# EAGLE board FTDI_SmartBasic-Panel-v11 (EAGLE 6.6.0), part 1 of 3
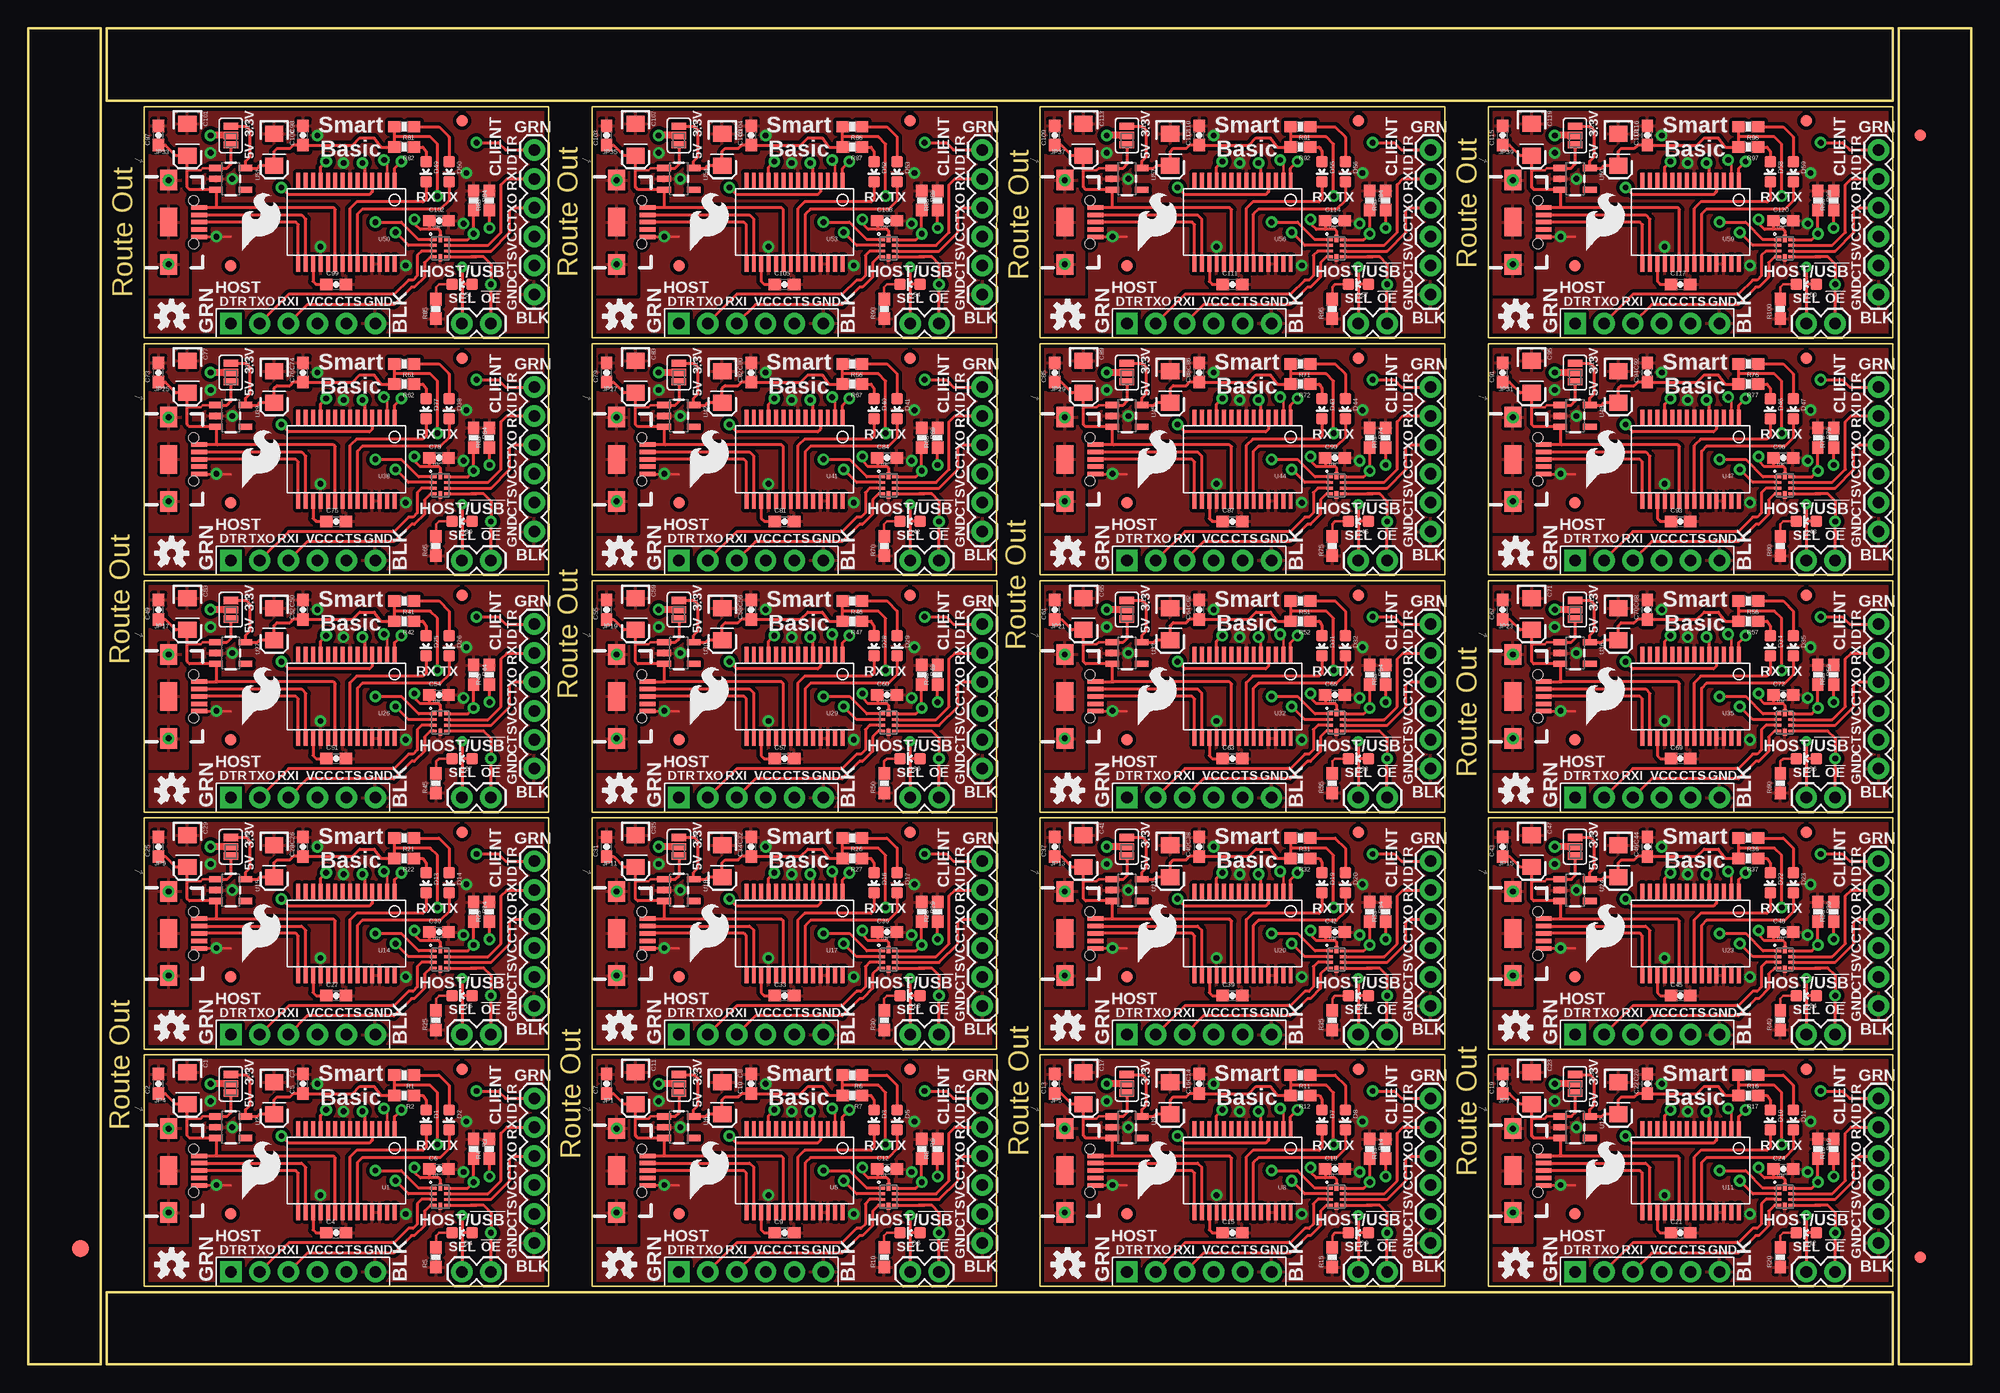
[diagram p0: board, top side]
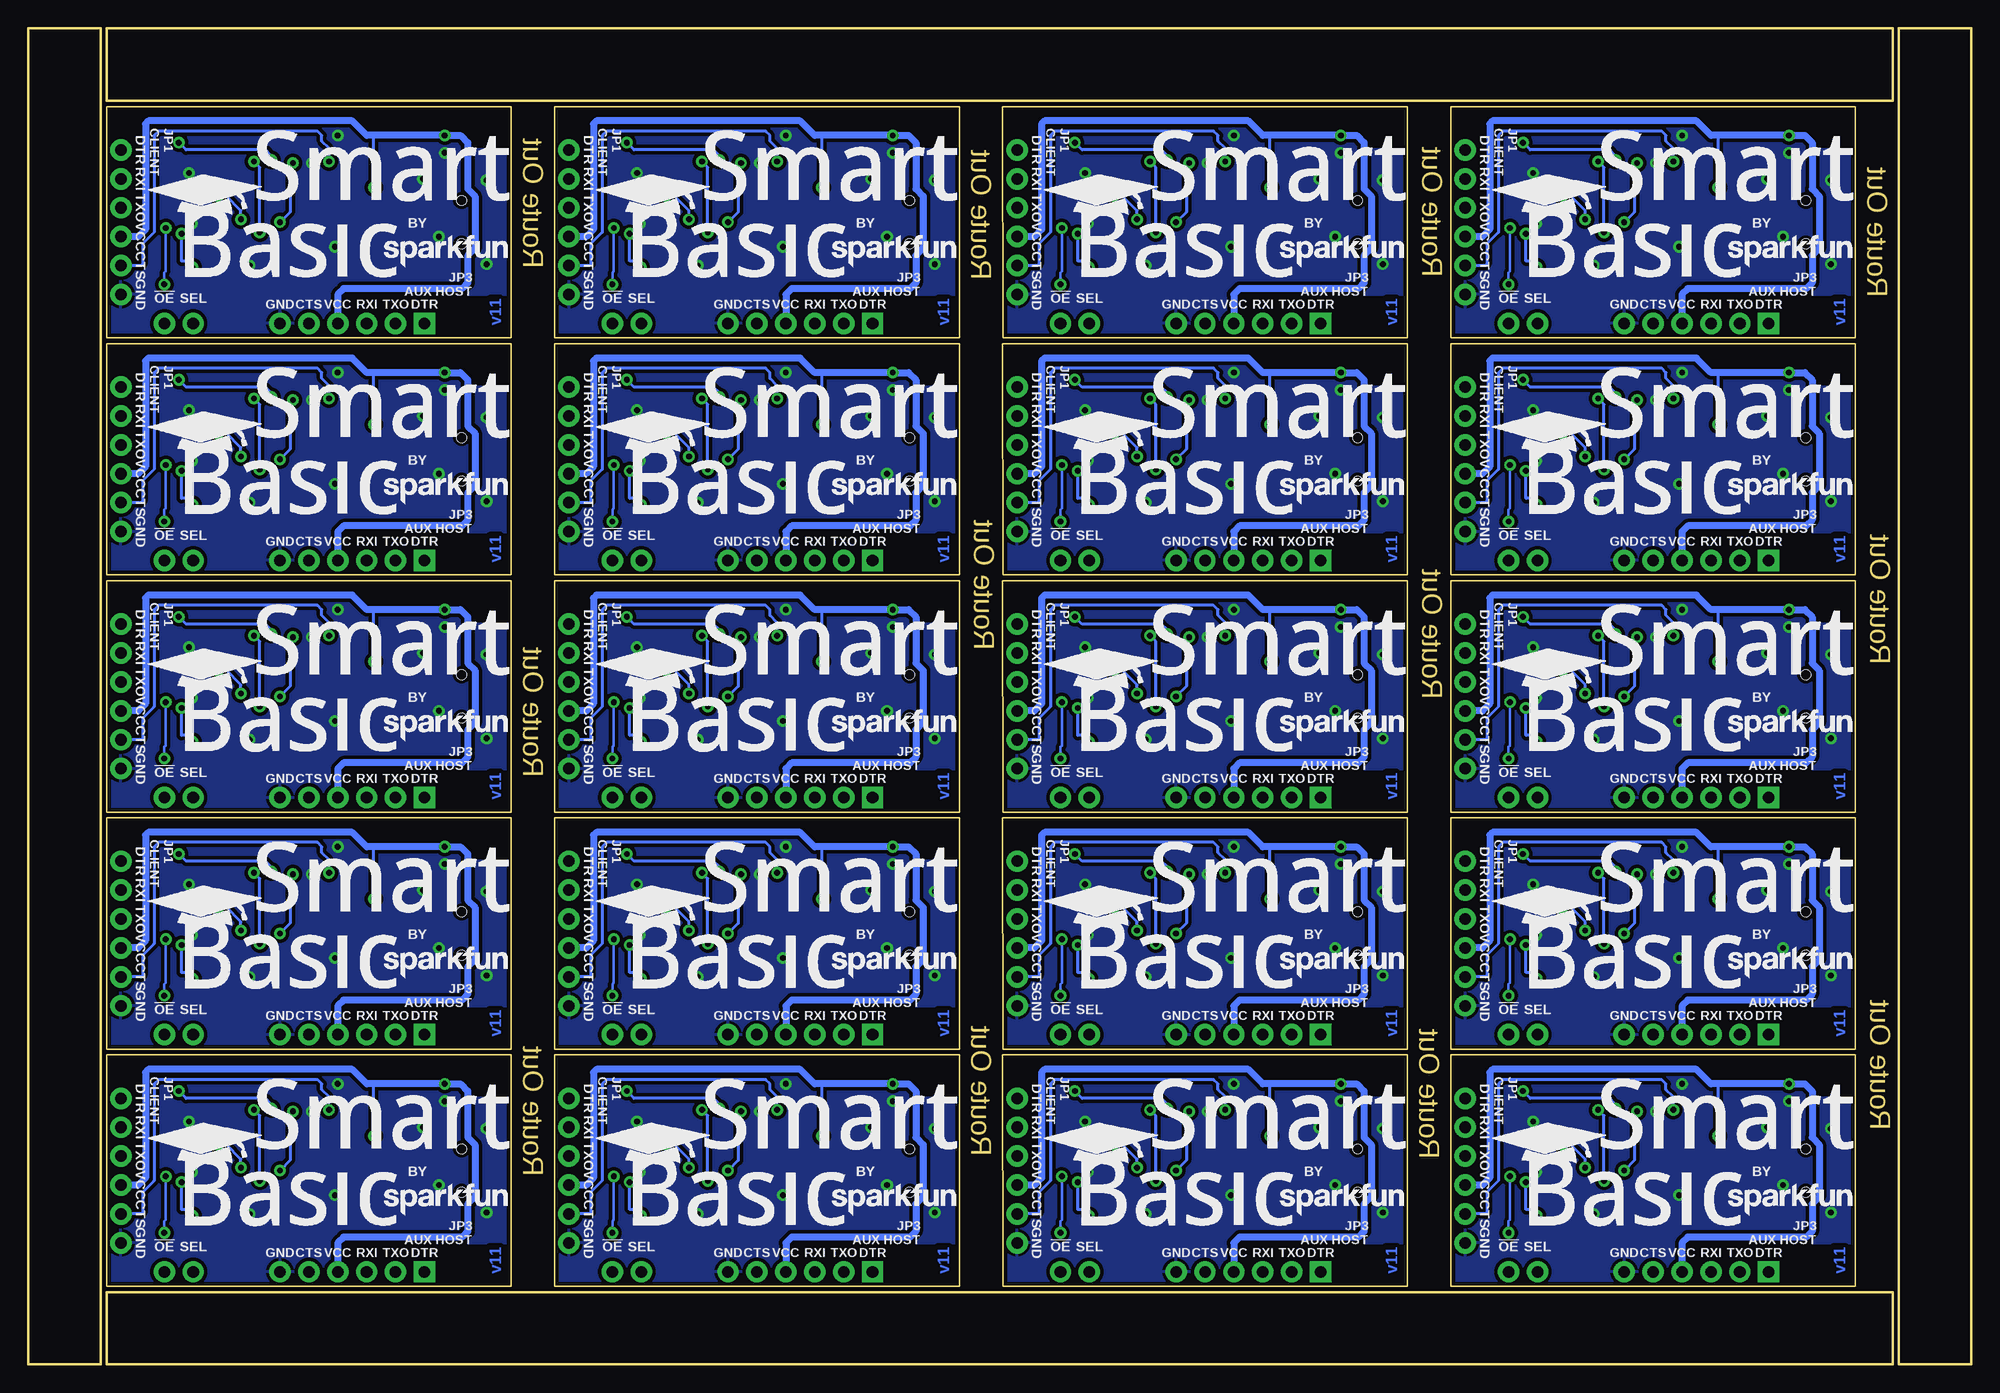
[diagram p1: board, bottom side, seen from below]

Size 170.69 x 117.35 mm. Coordinates in mm from the lower left corner, seen from the top.
Outline: 6.35,79.25 6.35,0 0,0 0,29.72
Outline: 0,28.45 0,117.35 6.35,117.35 6.35,77.98
Outline: 10.16,6.86 45.7,6.86 45.72,27.18 10.16,27.18 10.16,6.86
Outline: 49.53,6.86 85.07,6.86 85.09,27.18 49.53,27.18 49.53,6.86
Outline: 88.9,6.86 124.44,6.86 124.46,27.18 88.9,27.18 88.9,6.86
Outline: 128.27,6.86 163.81,6.86 163.83,27.18 128.27,27.18 128.27,6.86
Outline: 10.16,27.69 45.7,27.69 45.72,48.01 10.16,48.01 10.16,27.69
Outline: 49.53,27.69 85.07,27.69 85.09,48.01 49.53,48.01 49.53,27.69
Outline: 88.9,27.69 124.44,27.69 124.46,48.01 88.9,48.01 88.9,27.69
Outline: 128.27,27.69 163.81,27.69 163.83,48.01 128.27,48.01 128.27,27.69
Outline: 10.16,48.51 45.7,48.51 45.72,68.83 10.16,68.83 10.16,48.51
Outline: 49.53,48.51 85.07,48.51 85.09,68.83 49.53,68.83 49.53,48.51
Outline: 88.9,48.51 124.44,48.51 124.46,68.83 88.9,68.83 88.9,48.51
Outline: 128.27,48.51 163.81,48.51 163.83,68.83 128.27,68.83 128.27,48.51
Outline: 10.16,69.34 45.7,69.34 45.72,89.66 10.16,89.66 10.16,69.34
Outline: 49.53,69.34 85.07,69.34 85.09,89.66 49.53,89.66 49.53,69.34
Outline: 88.9,69.34 124.44,69.34 124.46,89.66 88.9,89.66 88.9,69.34
Outline: 128.27,69.34 163.81,69.34 163.83,89.66 128.27,89.66 128.27,69.34
Outline: 10.16,90.17 45.7,90.17 45.72,110.49 10.16,110.49 10.16,90.17
Outline: 49.53,90.17 85.07,90.17 85.09,110.49 49.53,110.49 49.53,90.17
Outline: 88.9,90.17 124.44,90.17 124.46,110.49 88.9,110.49 88.9,90.17
Outline: 128.27,90.17 163.81,90.17 163.83,110.49 128.27,110.49 128.27,90.17
Outline: 6.86,6.35 6.86,0 163.83,0 163.83,6.35 6.86,6.35
Outline: 170.69,0 170.69,117.35 164.34,117.35 164.34,0 170.69,0
Outline: 163.83,111 163.83,117.35 6.86,117.35 6.86,111 163.83,111
Copper layers (1*16): Top 0.035mm / dielectric 1.5mm / Bottom 0.035mm
Design rules "Sparkfun *": minimum track width 8mil, minimum drill 20mil, track to track 8mil, track to pad 8mil, pad to pad 8mil, via to via 8mil, smd to smd 8mil, copper to edge 8mil, drill to drill 8mil, minimum pad ring 12mil, minimum via ring 10mil, stop-mask expansion 4mil, vias tented up to drill 20mil, thermal gap 10mil

## Footprints (pad centres in the part's own frame; a part is rotated, then mirrored left to right if it is on the bottom)
EIA3216 = smd 1.4 x 1.6: A 1.4,0; C -1.4,0
0603-CAP = smd 1.1 x 1: 1 -0.85,0; 2 0.85,0
FTDI_BASIC = drill 1.016 pad 1.88: CTS 10.16,0; DTR 0,0; GND 12.7,0; RXI 2.54,0; TXO 5.08,0; VCC 7.62,0
LED-0603 = smd 1 x 1: A 0,-0.877; C 0,0.877
FIDUCIAL-1.5X3 = smd 1.5 x 1.5: 1 0,0
FIDUCIAL-1X2 = smd 1 x 1: 1 0,0
FTDI_DEVICE_SIDE = drill 1.016 pad 1.88 square: P$1 -6.35,0 | drill 1.016 pad 1.88: P$2 -3.81,0; P$3 -1.27,0; P$4 1.27,0; P$5 3.81,0; P$6 6.35,0
USB-B-MICRO-SMD_V03 = smd 1.4 x 0.4: D+1 2.7,0; D-1 2.7,0.65; GND1 2.7,-1.3; ID1 2.7,-0.65; VBUS1 2.7,1.3 | smd 1.5 x 1.8: SHIELD1 0,3.7; SHIELD2 0,-3.7 | smd 1.5 x 2.5: SHIELD3 0,0 | hole 0.85: 2.2,1.9; 2.2,-1.9
1X02 = drill 1.016 pad 1.88: 1 0,0; 2 2.54,0
0603-RES = smd 1.1 x 1: 1 -0.85,0; 2 0.85,0
PAD-JUMPER-3-2OF3_NC_BY_PASTE_YES_SILK_FULL_BOX = smd 0.635 x 1.27: 1 -0.813,0; 2 0,0; 3 0.813,0
SSOP28DB = smd 0.348 x 1.397: 1 -4.225,-3.656; 2 -3.575,-3.656; 3 -2.925,-3.656; 4 -2.275,-3.656; 5 -1.625,-3.656; 6 -0.975,-3.656; 7 -0.325,-3.656; 8 0.325,-3.656; 9 0.975,-3.656; 10 1.625,-3.656; 11 2.275,-3.656; 12 2.925,-3.656; 13 3.575,-3.656; 14 4.225,-3.656; 15 4.225,3.656; 16 3.575,3.656; 17 2.925,3.656; 18 2.275,3.656; 19 1.625,3.656; 20 0.975,3.656; 21 0.325,3.656; 22 -0.325,3.656; 23 -0.975,3.656; 24 -1.625,3.656; 25 -2.275,3.656; 26 -2.925,3.656; 27 -3.575,3.656; 28 -4.225,3.656
SOT23-5 = smd 0.55 x 1.2: 1 -0.95,-1.3; 2 0,-1.3; 3 0.95,-1.3; 4 0.95,1.3; 5 -0.95,1.3
QFN-10-RSE = smd 0.58 x 0.25: 1 -0.6,0.75; 2 -0.6,0.25; 3 -0.6,-0.25; 4 -0.6,-0.75; 6 0.6,-0.75; 7 0.6,-0.25; 8 0.6,0.25; 9 0.6,0.75 | smd 0.35 x 0.63: 5 0,-0.85; 10 0,0.85

## Placement (x,y rotation side)
C1  10uF  [EIA3216]  13.97,24.26 270 top
C2  0.1uF  [0603-CAP]  11.43,24.64 90 top
C3  10uF  [EIA3216]  21.59,23.37 270 top
C4  0.1uF  [0603-CAP]  27.05,11.56 0 top
C5  0.1uF  [0603-CAP]  24.13,24.64 90 top
C6  0.1uF  [0603-CAP]  36.07,17.14 0 top
C7  0.1uF  [0603-CAP]  50.8,24.64 90 top
C8  10uF  [EIA3216]  60.96,23.37 270 top
C9  0.1uF  [0603-CAP]  66.42,11.56 0 top
C10  0.1uF  [0603-CAP]  63.5,24.64 90 top
C11  10uF  [EIA3216]  53.34,24.26 270 top
C12  0.1uF  [0603-CAP]  75.44,17.14 0 top
C13  0.1uF  [0603-CAP]  90.17,24.64 90 top
C14  10uF  [EIA3216]  100.33,23.37 270 top
C15  0.1uF  [0603-CAP]  105.79,11.56 0 top
C16  0.1uF  [0603-CAP]  102.87,24.64 90 top
C17  10uF  [EIA3216]  92.71,24.26 270 top
C18  0.1uF  [0603-CAP]  114.81,17.14 0 top
C19  0.1uF  [0603-CAP]  129.54,24.64 90 top
C20  10uF  [EIA3216]  139.7,23.37 270 top
C21  0.1uF  [0603-CAP]  145.16,11.56 0 top
C22  0.1uF  [0603-CAP]  142.24,24.64 90 top
C23  10uF  [EIA3216]  132.08,24.26 270 top
C24  0.1uF  [0603-CAP]  154.18,17.14 0 top
C25  0.1uF  [0603-CAP]  11.43,45.47 90 top
C26  10uF  [EIA3216]  21.59,44.2 270 top
C27  0.1uF  [0603-CAP]  27.05,32.38 0 top
C28  0.1uF  [0603-CAP]  24.13,45.47 90 top
C29  10uF  [EIA3216]  13.97,45.09 270 top
C30  0.1uF  [0603-CAP]  36.07,37.97 0 top
C31  0.1uF  [0603-CAP]  50.8,45.47 90 top
C32  10uF  [EIA3216]  60.96,44.2 270 top
C33  0.1uF  [0603-CAP]  66.42,32.38 0 top
C34  0.1uF  [0603-CAP]  63.5,45.47 90 top
C35  10uF  [EIA3216]  53.34,45.09 270 top
C36  0.1uF  [0603-CAP]  75.44,37.97 0 top
C37  0.1uF  [0603-CAP]  90.17,45.47 90 top
C38  10uF  [EIA3216]  100.33,44.2 270 top
C39  0.1uF  [0603-CAP]  105.79,32.38 0 top
C40  0.1uF  [0603-CAP]  102.87,45.47 90 top
C41  10uF  [EIA3216]  92.71,45.09 270 top
C42  0.1uF  [0603-CAP]  114.81,37.97 0 top
C43  0.1uF  [0603-CAP]  129.54,45.47 90 top
C44  10uF  [EIA3216]  139.7,44.2 270 top
C45  0.1uF  [0603-CAP]  145.16,32.38 0 top
C46  0.1uF  [0603-CAP]  142.24,45.47 90 top
C47  10uF  [EIA3216]  132.08,45.09 270 top
C48  0.1uF  [0603-CAP]  154.18,37.97 0 top
C49  0.1uF  [0603-CAP]  11.43,66.29 90 top
C50  10uF  [EIA3216]  21.59,65.02 270 top
C51  0.1uF  [0603-CAP]  27.05,53.21 0 top
C52  0.1uF  [0603-CAP]  24.13,66.29 90 top
C53  10uF  [EIA3216]  13.97,65.91 270 top
C54  0.1uF  [0603-CAP]  36.07,58.8 0 top
C55  0.1uF  [0603-CAP]  50.8,66.29 90 top
C56  10uF  [EIA3216]  60.96,65.02 270 top
C57  0.1uF  [0603-CAP]  66.42,53.21 0 top
C58  0.1uF  [0603-CAP]  63.5,66.29 90 top
C59  10uF  [EIA3216]  53.34,65.91 270 top
C60  0.1uF  [0603-CAP]  75.44,58.8 0 top
C61  0.1uF  [0603-CAP]  90.17,66.29 90 top
C62  10uF  [EIA3216]  100.33,65.02 270 top
C63  0.1uF  [0603-CAP]  105.79,53.21 0 top
C64  0.1uF  [0603-CAP]  102.87,66.29 90 top
C65  10uF  [EIA3216]  92.71,65.91 270 top
C66  0.1uF  [0603-CAP]  114.81,58.8 0 top
C67  0.1uF  [0603-CAP]  129.54,66.29 90 top
C68  10uF  [EIA3216]  139.7,65.02 270 top
C69  0.1uF  [0603-CAP]  145.16,53.21 0 top
C70  0.1uF  [0603-CAP]  142.24,66.29 90 top
C71  10uF  [EIA3216]  132.08,65.91 270 top
C72  0.1uF  [0603-CAP]  154.18,58.8 0 top
C73  0.1uF  [0603-CAP]  11.43,87.12 90 top
C74  10uF  [EIA3216]  21.59,85.85 270 top
C75  0.1uF  [0603-CAP]  27.05,74.04 0 top
C76  0.1uF  [0603-CAP]  24.13,87.12 90 top
C77  10uF  [EIA3216]  13.97,86.74 270 top
C78  0.1uF  [0603-CAP]  36.07,79.63 0 top
C79  0.1uF  [0603-CAP]  50.8,87.12 90 top
C80  10uF  [EIA3216]  60.96,85.85 270 top
C81  0.1uF  [0603-CAP]  66.42,74.04 0 top
C82  0.1uF  [0603-CAP]  63.5,87.12 90 top
C83  10uF  [EIA3216]  53.34,86.74 270 top
C84  0.1uF  [0603-CAP]  75.44,79.63 0 top
C85  0.1uF  [0603-CAP]  90.17,87.12 90 top
C86  10uF  [EIA3216]  100.33,85.85 270 top
C87  0.1uF  [0603-CAP]  105.79,74.04 0 top
C88  0.1uF  [0603-CAP]  102.87,87.12 90 top
C89  10uF  [EIA3216]  92.71,86.74 270 top
C90  0.1uF  [0603-CAP]  114.81,79.63 0 top
C91  0.1uF  [0603-CAP]  129.54,87.12 90 top
C92  10uF  [EIA3216]  139.7,85.85 270 top
C93  0.1uF  [0603-CAP]  145.16,74.04 0 top
C94  0.1uF  [0603-CAP]  142.24,87.12 90 top
C95  10uF  [EIA3216]  132.08,86.74 270 top
C96  0.1uF  [0603-CAP]  154.18,79.63 0 top
C97  0.1uF  [0603-CAP]  11.43,107.95 90 top
C98  10uF  [EIA3216]  21.59,106.68 270 top
C99  0.1uF  [0603-CAP]  27.05,94.87 0 top
C100  0.1uF  [0603-CAP]  24.13,107.95 90 top
C101  10uF  [EIA3216]  13.97,107.57 270 top
C102  0.1uF  [0603-CAP]  36.07,100.46 0 top
C103  0.1uF  [0603-CAP]  50.8,107.95 90 top
C104  10uF  [EIA3216]  60.96,106.68 270 top
C105  0.1uF  [0603-CAP]  66.42,94.87 0 top
C106  0.1uF  [0603-CAP]  63.5,107.95 90 top
C107  10uF  [EIA3216]  53.34,107.57 270 top
C108  0.1uF  [0603-CAP]  75.44,100.46 0 top
C109  0.1uF  [0603-CAP]  90.17,107.95 90 top
C110  10uF  [EIA3216]  100.33,106.68 270 top
C111  0.1uF  [0603-CAP]  105.79,94.87 0 top
C112  0.1uF  [0603-CAP]  102.87,107.95 90 top
C113  10uF  [EIA3216]  92.71,107.57 270 top
C114  0.1uF  [0603-CAP]  114.81,100.46 0 top
C115  0.1uF  [0603-CAP]  129.54,107.95 90 top
C116  10uF  [EIA3216]  139.7,106.68 270 top
C117  0.1uF  [0603-CAP]  145.16,94.87 0 top
C118  0.1uF  [0603-CAP]  142.24,107.95 90 top
C119  10uF  [EIA3216]  132.08,107.57 270 top
C120  0.1uF  [0603-CAP]  154.18,100.46 0 top
CLIENT  [FTDI_BASIC]  44.45,23.37 270 top
CLIENT1  [FTDI_BASIC]  83.82,23.37 270 top
CLIENT2  [FTDI_BASIC]  123.19,23.37 270 top
CLIENT3  [FTDI_BASIC]  162.56,23.37 270 top
CLIENT4  [FTDI_BASIC]  44.45,44.2 270 top
CLIENT5  [FTDI_BASIC]  83.82,44.2 270 top
CLIENT6  [FTDI_BASIC]  123.19,44.2 270 top
CLIENT7  [FTDI_BASIC]  162.56,44.2 270 top
CLIENT8  [FTDI_BASIC]  44.45,65.02 270 top
CLIENT9  [FTDI_BASIC]  83.82,65.02 270 top
CLIENT10  [FTDI_BASIC]  123.19,65.02 270 top
CLIENT11  [FTDI_BASIC]  162.56,65.02 270 top
CLIENT12  [FTDI_BASIC]  44.45,85.85 270 top
CLIENT13  [FTDI_BASIC]  83.82,85.85 270 top
CLIENT14  [FTDI_BASIC]  123.19,85.85 270 top
CLIENT15  [FTDI_BASIC]  162.56,85.85 270 top
CLIENT16  [FTDI_BASIC]  44.45,106.68 270 top
CLIENT17  [FTDI_BASIC]  83.82,106.68 270 top
CLIENT18  [FTDI_BASIC]  123.19,106.68 270 top
CLIENT19  [FTDI_BASIC]  162.56,106.68 270 top
D1  GREEN  [LED-0603]  34.92,21.46 180 top
D2  RED  [LED-0603]  36.96,21.46 180 top
D3  GREEN  [LED-0603]  74.3,21.46 180 top
D4  GREEN  [LED-0603]  38.1,11.56 90 top
D5  RED  [LED-0603]  76.33,21.46 180 top
D6  GREEN  [LED-0603]  77.47,11.56 90 top
D7  GREEN  [LED-0603]  113.67,21.46 180 top
D8  RED  [LED-0603]  115.7,21.46 180 top
D9  GREEN  [LED-0603]  116.84,11.56 90 top
D10  GREEN  [LED-0603]  153.03,21.46 180 top
D11  RED  [LED-0603]  155.07,21.46 180 top
D12  GREEN  [LED-0603]  156.21,11.56 90 top
D13  GREEN  [LED-0603]  34.92,42.29 180 top
D14  RED  [LED-0603]  36.96,42.29 180 top
D15  GREEN  [LED-0603]  38.1,32.38 90 top
D16  GREEN  [LED-0603]  74.3,42.29 180 top
D17  RED  [LED-0603]  76.33,42.29 180 top
D18  GREEN  [LED-0603]  77.47,32.38 90 top
D19  GREEN  [LED-0603]  113.67,42.29 180 top
D20  RED  [LED-0603]  115.7,42.29 180 top
D21  GREEN  [LED-0603]  116.84,32.38 90 top
D22  GREEN  [LED-0603]  153.03,42.29 180 top
D23  RED  [LED-0603]  155.07,42.29 180 top
D24  GREEN  [LED-0603]  156.21,32.38 90 top
D25  GREEN  [LED-0603]  34.92,63.12 180 top
D26  RED  [LED-0603]  36.96,63.12 180 top
D27  GREEN  [LED-0603]  38.1,53.21 90 top
D28  GREEN  [LED-0603]  74.3,63.12 180 top
D29  RED  [LED-0603]  76.33,63.12 180 top
D30  GREEN  [LED-0603]  77.47,53.21 90 top
D31  GREEN  [LED-0603]  113.67,63.12 180 top
D32  RED  [LED-0603]  115.7,63.12 180 top
D33  GREEN  [LED-0603]  116.84,53.21 90 top
D34  GREEN  [LED-0603]  153.03,63.12 180 top
D35  RED  [LED-0603]  155.07,63.12 180 top
D36  GREEN  [LED-0603]  156.21,53.21 90 top
D37  GREEN  [LED-0603]  34.92,83.95 180 top
D38  RED  [LED-0603]  36.96,83.95 180 top
D39  GREEN  [LED-0603]  38.1,74.04 90 top
D40  GREEN  [LED-0603]  74.3,83.95 180 top
D41  RED  [LED-0603]  76.33,83.95 180 top
D42  GREEN  [LED-0603]  77.47,74.04 90 top
D43  GREEN  [LED-0603]  113.67,83.95 180 top
D44  RED  [LED-0603]  115.7,83.95 180 top
D45  GREEN  [LED-0603]  116.84,74.04 90 top
D46  GREEN  [LED-0603]  153.03,83.95 180 top
D47  RED  [LED-0603]  155.07,83.95 180 top
D48  GREEN  [LED-0603]  156.21,74.04 90 top
D49  GREEN  [LED-0603]  34.92,104.78 180 top
D50  RED  [LED-0603]  36.96,104.78 180 top
D51  GREEN  [LED-0603]  38.1,94.87 90 top
D52  GREEN  [LED-0603]  74.3,104.78 180 top
D53  RED  [LED-0603]  76.33,104.78 180 top
D54  GREEN  [LED-0603]  77.47,94.87 90 top
D55  GREEN  [LED-0603]  113.67,104.78 180 top
D56  RED  [LED-0603]  115.7,104.78 180 top
D57  GREEN  [LED-0603]  116.84,94.87 90 top
D58  GREEN  [LED-0603]  153.03,104.78 180 top
D59  RED  [LED-0603]  155.07,104.78 180 top
D60  GREEN  [LED-0603]  156.21,94.87 90 top
E$1  [FIDUCIAL-1.5X3]  4.57,10.16 0 top
E$5  [FIDUCIAL-1X2]  166.24,9.4 0 top
E$7  [FIDUCIAL-1X2]  166.24,107.95 180 top
FID1  FIDUCIAL1X2  [FIDUCIAL-1X2]  17.78,13.21 0 top
FID2  FIDUCIAL1X2  [FIDUCIAL-1X2]  38.1,25.91 0 top
FID3  FIDUCIAL1X2  [FIDUCIAL-1X2]  57.15,13.21 0 top
FID4  FIDUCIAL1X2  [FIDUCIAL-1X2]  77.47,25.91 0 top
FID5  FIDUCIAL1X2  [FIDUCIAL-1X2]  96.52,13.21 0 top
FID6  FIDUCIAL1X2  [FIDUCIAL-1X2]  116.84,25.91 0 top
FID7  FIDUCIAL1X2  [FIDUCIAL-1X2]  135.89,13.21 0 top
FID8  FIDUCIAL1X2  [FIDUCIAL-1X2]  156.21,25.91 0 top
FID9  FIDUCIAL1X2  [FIDUCIAL-1X2]  17.78,34.04 0 top
FID10  FIDUCIAL1X2  [FIDUCIAL-1X2]  38.1,46.74 0 top
FID11  FIDUCIAL1X2  [FIDUCIAL-1X2]  57.15,34.04 0 top
FID12  FIDUCIAL1X2  [FIDUCIAL-1X2]  77.47,46.74 0 top
FID13  FIDUCIAL1X2  [FIDUCIAL-1X2]  96.52,34.04 0 top
FID14  FIDUCIAL1X2  [FIDUCIAL-1X2]  116.84,46.74 0 top
FID15  FIDUCIAL1X2  [FIDUCIAL-1X2]  135.89,34.04 0 top
FID16  FIDUCIAL1X2  [FIDUCIAL-1X2]  156.21,46.74 0 top
FID17  FIDUCIAL1X2  [FIDUCIAL-1X2]  17.78,54.86 0 top
FID18  FIDUCIAL1X2  [FIDUCIAL-1X2]  38.1,67.56 0 top
FID19  FIDUCIAL1X2  [FIDUCIAL-1X2]  57.15,54.86 0 top
FID20  FIDUCIAL1X2  [FIDUCIAL-1X2]  77.47,67.56 0 top
FID21  FIDUCIAL1X2  [FIDUCIAL-1X2]  96.52,54.86 0 top
FID22  FIDUCIAL1X2  [FIDUCIAL-1X2]  116.84,67.56 0 top
FID23  FIDUCIAL1X2  [FIDUCIAL-1X2]  135.89,54.86 0 top
FID24  FIDUCIAL1X2  [FIDUCIAL-1X2]  156.21,67.56 0 top
FID25  FIDUCIAL1X2  [FIDUCIAL-1X2]  17.78,75.69 0 top
FID26  FIDUCIAL1X2  [FIDUCIAL-1X2]  38.1,88.39 0 top
FID27  FIDUCIAL1X2  [FIDUCIAL-1X2]  57.15,75.69 0 top
FID28  FIDUCIAL1X2  [FIDUCIAL-1X2]  77.47,88.39 0 top
FID29  FIDUCIAL1X2  [FIDUCIAL-1X2]  96.52,75.69 0 top
FID30  FIDUCIAL1X2  [FIDUCIAL-1X2]  116.84,88.39 0 top
FID31  FIDUCIAL1X2  [FIDUCIAL-1X2]  135.89,75.69 0 top
FID32  FIDUCIAL1X2  [FIDUCIAL-1X2]  156.21,88.39 0 top
FID33  FIDUCIAL1X2  [FIDUCIAL-1X2]  17.78,96.52 0 top
FID34  FIDUCIAL1X2  [FIDUCIAL-1X2]  38.1,109.22 0 top
FID35  FIDUCIAL1X2  [FIDUCIAL-1X2]  57.15,96.52 0 top
FID36  FIDUCIAL1X2  [FIDUCIAL-1X2]  77.47,109.22 0 top
FID37  FIDUCIAL1X2  [FIDUCIAL-1X2]  96.52,96.52 0 top
FID38  FIDUCIAL1X2  [FIDUCIAL-1X2]  116.84,109.22 0 top
FID39  FIDUCIAL1X2  [FIDUCIAL-1X2]  135.89,96.52 0 top
FID40  FIDUCIAL1X2  [FIDUCIAL-1X2]  156.21,109.22 0 top
HOST  [FTDI_DEVICE_SIDE]  24.13,8.13 0 top
HOST1  [FTDI_DEVICE_SIDE]  63.5,8.13 0 top
HOST2  [FTDI_DEVICE_SIDE]  102.87,8.13 0 top
HOST3  [FTDI_DEVICE_SIDE]  142.24,8.13 0 top
HOST4  [FTDI_DEVICE_SIDE]  24.13,28.96 0 top
HOST5  [FTDI_DEVICE_SIDE]  63.5,28.96 0 top
HOST6  [FTDI_DEVICE_SIDE]  102.87,28.96 0 top
HOST7  [FTDI_DEVICE_SIDE]  142.24,28.96 0 top
HOST8  [FTDI_DEVICE_SIDE]  24.13,49.78 0 top
HOST9  [FTDI_DEVICE_SIDE]  63.5,49.78 0 top
HOST10  [FTDI_DEVICE_SIDE]  102.87,49.78 0 top
HOST11  [FTDI_DEVICE_SIDE]  142.24,49.78 0 top
HOST12  [FTDI_DEVICE_SIDE]  24.13,70.61 0 top
HOST13  [FTDI_DEVICE_SIDE]  63.5,70.61 0 top
HOST14  [FTDI_DEVICE_SIDE]  102.87,70.61 0 top
HOST15  [FTDI_DEVICE_SIDE]  142.24,70.61 0 top
HOST16  [FTDI_DEVICE_SIDE]  24.13,91.44 0 top
HOST17  [FTDI_DEVICE_SIDE]  63.5,91.44 0 top
HOST18  [FTDI_DEVICE_SIDE]  102.87,91.44 0 top
HOST19  [FTDI_DEVICE_SIDE]  142.24,91.44 0 top
JP1  USB Micro B  [USB-B-MICRO-SMD_V03]  51.69,17.02 0 top
JP2  M02PTH  [1X02]  40.64,8.13 180 top
JP3  M02PTH  [1X02]  80.01,8.13 180 top
JP4  USB Micro B  [USB-B-MICRO-SMD_V03]  12.32,17.02 0 top
JP5  USB Micro B  [USB-B-MICRO-SMD_V03]  91.06,17.02 0 top
JP6  M02PTH  [1X02]  119.38,8.13 180 top
JP7  USB Micro B  [USB-B-MICRO-SMD_V03]  130.43,17.02 0 top
JP8  M02PTH  [1X02]  158.75,8.13 180 top
JP9  USB Micro B  [USB-B-MICRO-SMD_V03]  12.32,37.85 0 top
JP10  M02PTH  [1X02]  40.64,28.96 180 top
JP11  USB Micro B  [USB-B-MICRO-SMD_V03]  51.69,37.85 0 top
JP12  M02PTH  [1X02]  80.01,28.96 180 top
JP13  USB Micro B  [USB-B-MICRO-SMD_V03]  91.06,37.85 0 top
JP14  M02PTH  [1X02]  119.38,28.96 180 top
JP15  USB Micro B  [USB-B-MICRO-SMD_V03]  130.43,37.85 0 top
JP16  M02PTH  [1X02]  158.75,28.96 180 top
JP17  USB Micro B  [USB-B-MICRO-SMD_V03]  12.32,58.67 0 top
JP18  M02PTH  [1X02]  40.64,49.78 180 top
JP19  USB Micro B  [USB-B-MICRO-SMD_V03]  51.69,58.67 0 top
JP20  M02PTH  [1X02]  80.01,49.78 180 top
JP21  USB Micro B  [USB-B-MICRO-SMD_V03]  91.06,58.67 0 top
JP22  M02PTH  [1X02]  119.38,49.78 180 top
JP23  USB Micro B  [USB-B-MICRO-SMD_V03]  130.43,58.67 0 top
JP24  M02PTH  [1X02]  158.75,49.78 180 top
JP25  USB Micro B  [USB-B-MICRO-SMD_V03]  12.32,79.5 0 top
JP26  M02PTH  [1X02]  40.64,70.61 180 top
JP27  USB Micro B  [USB-B-MICRO-SMD_V03]  51.69,79.5 0 top
JP28  M02PTH  [1X02]  80.01,70.61 180 top
JP29  USB Micro B  [USB-B-MICRO-SMD_V03]  91.06,79.5 0 top
JP30  M02PTH  [1X02]  119.38,70.61 180 top
JP31  USB Micro B  [USB-B-MICRO-SMD_V03]  130.43,79.5 0 top
JP32  M02PTH  [1X02]  158.75,70.61 180 top
JP33  USB Micro B  [USB-B-MICRO-SMD_V03]  12.32,100.33 0 top
JP34  M02PTH  [1X02]  40.64,91.44 180 top
JP35  USB Micro B  [USB-B-MICRO-SMD_V03]  51.69,100.33 0 top
JP36  M02PTH  [1X02]  80.01,91.44 180 top
JP37  USB Micro B  [USB-B-MICRO-SMD_V03]  91.06,100.33 0 top
JP38  M02PTH  [1X02]  119.38,91.44 180 top
JP39  USB Micro B  [USB-B-MICRO-SMD_V03]  130.43,100.33 0 top
JP40  M02PTH  [1X02]  158.75,91.44 180 top
LOGO1  SFE_LOGO_NAME.1_INCH  [SFE_LOGO_NAME_.1]  21.84,12.57 0 bottom
LOGO2  SFE_LOGO_FLAME.2_INCH  [SFE_LOGO_FLAME_.2]  18.41,14.22 0 top
LOGO3  OSHW-LOGOS  [OSHW-LOGO-S]  12.57,8.76 0 top
LOGO4  SFE_LOGO_NAME.1_INCH  [SFE_LOGO_NAME_.1]  61.21,12.57 0 bottom
LOGO5  OSHW-LOGOS  [OSHW-LOGO-S]  51.94,8.76 0 top
LOGO6  SFE_LOGO_FLAME.2_INCH  [SFE_LOGO_FLAME_.2]  57.78,14.22 0 top
LOGO7  SFE_LOGO_NAME.1_INCH  [SFE_LOGO_NAME_.1]  100.58,12.57 0 bottom
LOGO8  OSHW-LOGOS  [OSHW-LOGO-S]  91.31,8.76 0 top
LOGO9  SFE_LOGO_FLAME.2_INCH  [SFE_LOGO_FLAME_.2]  97.16,14.22 0 top
LOGO10  SFE_LOGO_NAME.1_INCH  [SFE_LOGO_NAME_.1]  139.95,12.57 0 bottom
LOGO11  OSHW-LOGOS  [OSHW-LOGO-S]  130.68,8.76 0 top
LOGO12  SFE_LOGO_FLAME.2_INCH  [SFE_LOGO_FLAME_.2]  136.53,14.22 0 top
LOGO13  SFE_LOGO_NAME.1_INCH  [SFE_LOGO_NAME_.1]  21.84,33.4 0 bottom
LOGO14  OSHW-LOGOS  [OSHW-LOGO-S]  12.57,29.59 0 top
LOGO15  SFE_LOGO_FLAME.2_INCH  [SFE_LOGO_FLAME_.2]  18.41,35.05 0 top
LOGO16  SFE_LOGO_NAME.1_INCH  [SFE_LOGO_NAME_.1]  61.21,33.4 0 bottom
LOGO17  OSHW-LOGOS  [OSHW-LOGO-S]  51.94,29.59 0 top
LOGO18  SFE_LOGO_FLAME.2_INCH  [SFE_LOGO_FLAME_.2]  57.78,35.05 0 top
LOGO19  SFE_LOGO_NAME.1_INCH  [SFE_LOGO_NAME_.1]  100.58,33.4 0 bottom
LOGO20  OSHW-LOGOS  [OSHW-LOGO-S]  91.31,29.59 0 top
LOGO21  SFE_LOGO_FLAME.2_INCH  [SFE_LOGO_FLAME_.2]  97.16,35.05 0 top
LOGO22  SFE_LOGO_NAME.1_INCH  [SFE_LOGO_NAME_.1]  139.95,33.4 0 bottom
LOGO23  OSHW-LOGOS  [OSHW-LOGO-S]  130.68,29.59 0 top
LOGO24  SFE_LOGO_FLAME.2_INCH  [SFE_LOGO_FLAME_.2]  136.53,35.05 0 top
LOGO25  SFE_LOGO_NAME.1_INCH  [SFE_LOGO_NAME_.1]  21.84,54.23 0 bottom
LOGO26  OSHW-LOGOS  [OSHW-LOGO-S]  12.57,50.42 0 top
LOGO27  SFE_LOGO_FLAME.2_INCH  [SFE_LOGO_FLAME_.2]  18.41,55.88 0 top
LOGO28  SFE_LOGO_NAME.1_INCH  [SFE_LOGO_NAME_.1]  61.21,54.23 0 bottom
LOGO29  OSHW-LOGOS  [OSHW-LOGO-S]  51.94,50.42 0 top
LOGO30  SFE_LOGO_FLAME.2_INCH  [SFE_LOGO_FLAME_.2]  57.78,55.88 0 top
LOGO31  SFE_LOGO_NAME.1_INCH  [SFE_LOGO_NAME_.1]  100.58,54.23 0 bottom
LOGO32  OSHW-LOGOS  [OSHW-LOGO-S]  91.31,50.42 0 top
LOGO33  SFE_LOGO_FLAME.2_INCH  [SFE_LOGO_FLAME_.2]  97.16,55.88 0 top
LOGO34  SFE_LOGO_NAME.1_INCH  [SFE_LOGO_NAME_.1]  139.95,54.23 0 bottom
LOGO35  OSHW-LOGOS  [OSHW-LOGO-S]  130.68,50.42 0 top
LOGO36  SFE_LOGO_FLAME.2_INCH  [SFE_LOGO_FLAME_.2]  136.53,55.88 0 top
LOGO37  SFE_LOGO_NAME.1_INCH  [SFE_LOGO_NAME_.1]  21.84,75.06 0 bottom
LOGO38  OSHW-LOGOS  [OSHW-LOGO-S]  12.57,71.25 0 top
LOGO39  SFE_LOGO_FLAME.2_INCH  [SFE_LOGO_FLAME_.2]  18.41,76.71 0 top
LOGO40  SFE_LOGO_NAME.1_INCH  [SFE_LOGO_NAME_.1]  61.21,75.06 0 bottom
LOGO41  OSHW-LOGOS  [OSHW-LOGO-S]  51.94,71.25 0 top
LOGO42  SFE_LOGO_FLAME.2_INCH  [SFE_LOGO_FLAME_.2]  57.78,76.71 0 top
LOGO43  SFE_LOGO_NAME.1_INCH  [SFE_LOGO_NAME_.1]  100.58,75.06 0 bottom
LOGO44  OSHW-LOGOS  [OSHW-LOGO-S]  91.31,71.25 0 top
LOGO45  SFE_LOGO_FLAME.2_INCH  [SFE_LOGO_FLAME_.2]  97.16,76.71 0 top
LOGO46  SFE_LOGO_NAME.1_INCH  [SFE_LOGO_NAME_.1]  139.95,75.06 0 bottom
LOGO47  OSHW-LOGOS  [OSHW-LOGO-S]  130.68,71.25 0 top
LOGO48  SFE_LOGO_FLAME.2_INCH  [SFE_LOGO_FLAME_.2]  136.53,76.71 0 top
LOGO49  SFE_LOGO_NAME.1_INCH  [SFE_LOGO_NAME_.1]  21.84,95.89 0 bottom
LOGO50  OSHW-LOGOS  [OSHW-LOGO-S]  12.57,92.08 0 top
LOGO51  SFE_LOGO_FLAME.2_INCH  [SFE_LOGO_FLAME_.2]  18.41,97.54 0 top
LOGO52  SFE_LOGO_NAME.1_INCH  [SFE_LOGO_NAME_.1]  61.21,95.89 0 bottom
LOGO53  OSHW-LOGOS  [OSHW-LOGO-S]  51.94,92.08 0 top
LOGO54  SFE_LOGO_FLAME.2_INCH  [SFE_LOGO_FLAME_.2]  57.78,97.54 0 top
LOGO55  SFE_LOGO_NAME.1_INCH  [SFE_LOGO_NAME_.1]  100.58,95.89 0 bottom
LOGO56  OSHW-LOGOS  [OSHW-LOGO-S]  91.31,92.08 0 top
LOGO57  SFE_LOGO_FLAME.2_INCH  [SFE_LOGO_FLAME_.2]  97.16,97.54 0 top
LOGO58  SFE_LOGO_NAME.1_INCH  [SFE_LOGO_NAME_.1]  139.95,95.89 0 bottom
LOGO59  OSHW-LOGOS  [OSHW-LOGO-S]  130.68,92.08 0 top
LOGO60  SFE_LOGO_FLAME.2_INCH  [SFE_LOGO_FLAME_.2]  136.53,97.54 0 top
R1  1K  [0603-RES]  33.02,25.4 180 top
R2  1K  [0603-RES]  33.02,23.62 180 top
R3  1K  [0603-RES]  39.12,18.92 270 top
R4  10K  [0603-RES]  40.51,18.92 90 top
R5  1K  [0603-RES]  35.81,9.4 90 top
R6  1K  [0603-RES]  72.39,25.4 180 top
R7  1K  [0603-RES]  72.39,23.62 180 top
R8  10K  [0603-RES]  79.88,18.92 90 top
R9  1K  [0603-RES]  78.49,18.92 270 top
R10  1K  [0603-RES]  75.18,9.4 90 top
R11  1K  [0603-RES]  111.76,25.4 180 top
R12  1K  [0603-RES]  111.76,23.62 180 top
R13  10K  [0603-RES]  119.25,18.92 90 top
R14  1K  [0603-RES]  117.86,18.92 270 top
R15  1K  [0603-RES]  114.55,9.4 90 top
R16  1K  [0603-RES]  151.13,25.4 180 top
R17  1K  [0603-RES]  151.13,23.62 180 top
R18  10K  [0603-RES]  158.62,18.92 90 top
R19  1K  [0603-RES]  157.23,18.92 270 top
R20  1K  [0603-RES]  153.92,9.4 90 top
R21  1K  [0603-RES]  33.02,46.23 180 top
R22  1K  [0603-RES]  33.02,44.45 180 top
R23  10K  [0603-RES]  40.51,39.75 90 top
R24  1K  [0603-RES]  39.12,39.75 270 top
R25  1K  [0603-RES]  35.81,30.23 90 top
R26  1K  [0603-RES]  72.39,46.23 180 top
R27  1K  [0603-RES]  72.39,44.45 180 top
R28  10K  [0603-RES]  79.88,39.75 90 top
R29  1K  [0603-RES]  78.49,39.75 270 top
R30  1K  [0603-RES]  75.18,30.23 90 top
R31  1K  [0603-RES]  111.76,46.23 180 top
R32  1K  [0603-RES]  111.76,44.45 180 top
R33  10K  [0603-RES]  119.25,39.75 90 top
R34  1K  [0603-RES]  117.86,39.75 270 top
R35  1K  [0603-RES]  114.55,30.23 90 top
R36  1K  [0603-RES]  151.13,46.23 180 top
R37  1K  [0603-RES]  151.13,44.45 180 top
R38  10K  [0603-RES]  158.62,39.75 90 top
R39  1K  [0603-RES]  157.23,39.75 270 top
R40  1K  [0603-RES]  153.92,30.23 90 top
R41  1K  [0603-RES]  33.02,67.06 180 top
R42  1K  [0603-RES]  33.02,65.28 180 top
R43  10K  [0603-RES]  40.51,60.58 90 top
R44  1K  [0603-RES]  39.12,60.58 270 top
R45  1K  [0603-RES]  35.81,51.05 90 top
R46  1K  [0603-RES]  72.39,67.06 180 top
R47  1K  [0603-RES]  72.39,65.28 180 top
R48  10K  [0603-RES]  79.88,60.58 90 top
R49  1K  [0603-RES]  78.49,60.58 270 top
R50  1K  [0603-RES]  75.18,51.05 90 top
R51  1K  [0603-RES]  111.76,67.06 180 top
R52  1K  [0603-RES]  111.76,65.28 180 top
R53  10K  [0603-RES]  119.25,60.58 90 top
R54  1K  [0603-RES]  117.86,60.58 270 top
R55  1K  [0603-RES]  114.55,51.05 90 top
R56  1K  [0603-RES]  151.13,67.06 180 top
R57  1K  [0603-RES]  151.13,65.28 180 top
R58  10K  [0603-RES]  158.62,60.58 90 top
R59  1K  [0603-RES]  157.23,60.58 270 top
R60  1K  [0603-RES]  153.92,51.05 90 top
R61  1K  [0603-RES]  33.02,87.88 180 top
R62  1K  [0603-RES]  33.02,86.11 180 top
R63  10K  [0603-RES]  40.51,81.41 90 top
R64  1K  [0603-RES]  39.12,81.41 270 top
R65  1K  [0603-RES]  35.81,71.88 90 top
R66  1K  [0603-RES]  72.39,87.88 180 top
R67  1K  [0603-RES]  72.39,86.11 180 top
R68  10K  [0603-RES]  79.88,81.41 90 top
R69  1K  [0603-RES]  78.49,81.41 270 top
R70  1K  [0603-RES]  75.18,71.88 90 top
R71  1K  [0603-RES]  111.76,87.88 180 top
R72  1K  [0603-RES]  111.76,86.11 180 top
R73  10K  [0603-RES]  119.25,81.41 90 top
R74  1K  [0603-RES]  117.86,81.41 270 top
R75  1K  [0603-RES]  114.55,71.88 90 top
R76  1K  [0603-RES]  151.13,87.88 180 top
R77  1K  [0603-RES]  151.13,86.11 180 top
R78  10K  [0603-RES]  158.62,81.41 90 top
R79  1K  [0603-RES]  157.23,81.41 270 top
R80  1K  [0603-RES]  153.92,71.88 90 top
R81  1K  [0603-RES]  33.02,108.71 180 top
R82  1K  [0603-RES]  33.02,106.93 180 top
R83  10K  [0603-RES]  40.51,102.23 90 top
R84  1K  [0603-RES]  39.12,102.23 270 top
R85  1K  [0603-RES]  35.81,92.71 90 top
R86  1K  [0603-RES]  72.39,108.71 180 top
R87  1K  [0603-RES]  72.39,106.93 180 top
R88  10K  [0603-RES]  79.88,102.23 90 top
R89  1K  [0603-RES]  78.49,102.23 270 top
R90  1K  [0603-RES]  75.18,92.71 90 top
R91  1K  [0603-RES]  111.76,108.71 180 top
R92  1K  [0603-RES]  111.76,106.93 180 top
R93  10K  [0603-RES]  119.25,102.23 90 top
R94  1K  [0603-RES]  117.86,102.23 270 top
R95  1K  [0603-RES]  114.55,92.71 90 top
R96  1K  [0603-RES]  151.13,108.71 180 top
R97  1K  [0603-RES]  151.13,106.93 180 top
R98  10K  [0603-RES]  158.62,102.23 90 top
R99  1K  [0603-RES]  157.23,102.23 270 top
R100  1K  [0603-RES]  153.92,92.71 90 top
SJ1  JUMPER-PAD-3-2OF3_NC_BY_PASTE  [PAD-JUMPER-3-2OF3_NC_BY_PASTE_YES_SILK_FULL_BOX]  17.78,24.64 270 top
SJ2  JUMPER-PAD-3-2OF3_NC_BY_PASTE  [PAD-JUMPER-3-2OF3_NC_BY_PASTE_YES_SILK_FULL_BOX]  57.15,24.64 270 top
SJ3  JUMPER-PAD-3-2OF3_NC_BY_PASTE  [PAD-JUMPER-3-2OF3_NC_BY_PASTE_YES_SILK_FULL_BOX]  96.52,24.64 270 top
SJ4  JUMPER-PAD-3-2OF3_NC_BY_PASTE  [PAD-JUMPER-3-2OF3_NC_BY_PASTE_YES_SILK_FULL_BOX]  135.89,24.64 270 top
SJ5  JUMPER-PAD-3-2OF3_NC_BY_PASTE  [PAD-JUMPER-3-2OF3_NC_BY_PASTE_YES_SILK_FULL_BOX]  17.78,45.47 270 top
SJ6  JUMPER-PAD-3-2OF3_NC_BY_PASTE  [PAD-JUMPER-3-2OF3_NC_BY_PASTE_YES_SILK_FULL_BOX]  57.15,45.47 270 top
SJ7  JUMPER-PAD-3-2OF3_NC_BY_PASTE  [PAD-JUMPER-3-2OF3_NC_BY_PASTE_YES_SILK_FULL_BOX]  96.52,45.47 270 top
SJ8  JUMPER-PAD-3-2OF3_NC_BY_PASTE  [PAD-JUMPER-3-2OF3_NC_BY_PASTE_YES_SILK_FULL_BOX]  135.89,45.47 270 top
SJ9  JUMPER-PAD-3-2OF3_NC_BY_PASTE  [PAD-JUMPER-3-2OF3_NC_BY_PASTE_YES_SILK_FULL_BOX]  17.78,66.29 270 top
SJ10  JUMPER-PAD-3-2OF3_NC_BY_PASTE  [PAD-JUMPER-3-2OF3_NC_BY_PASTE_YES_SILK_FULL_BOX]  57.15,66.29 270 top
SJ11  JUMPER-PAD-3-2OF3_NC_BY_PASTE  [PAD-JUMPER-3-2OF3_NC_BY_PASTE_YES_SILK_FULL_BOX]  96.52,66.29 270 top
SJ12  JUMPER-PAD-3-2OF3_NC_BY_PASTE  [PAD-JUMPER-3-2OF3_NC_BY_PASTE_YES_SILK_FULL_BOX]  135.89,66.29 270 top
SJ13  JUMPER-PAD-3-2OF3_NC_BY_PASTE  [PAD-JUMPER-3-2OF3_NC_BY_PASTE_YES_SILK_FULL_BOX]  17.78,87.12 270 top
SJ14  JUMPER-PAD-3-2OF3_NC_BY_PASTE  [PAD-JUMPER-3-2OF3_NC_BY_PASTE_YES_SILK_FULL_BOX]  57.15,87.12 270 top
SJ15  JUMPER-PAD-3-2OF3_NC_BY_PASTE  [PAD-JUMPER-3-2OF3_NC_BY_PASTE_YES_SILK_FULL_BOX]  96.52,87.12 270 top
SJ16  JUMPER-PAD-3-2OF3_NC_BY_PASTE  [PAD-JUMPER-3-2OF3_NC_BY_PASTE_YES_SILK_FULL_BOX]  135.89,87.12 270 top
SJ17  JUMPER-PAD-3-2OF3_NC_BY_PASTE  [PAD-JUMPER-3-2OF3_NC_BY_PASTE_YES_SILK_FULL_BOX]  17.78,107.95 270 top
SJ18  JUMPER-PAD-3-2OF3_NC_BY_PASTE  [PAD-JUMPER-3-2OF3_NC_BY_PASTE_YES_SILK_FULL_BOX]  57.15,107.95 270 top
SJ19  JUMPER-PAD-3-2OF3_NC_BY_PASTE  [PAD-JUMPER-3-2OF3_NC_BY_PASTE_YES_SILK_FULL_BOX]  96.52,107.95 270 top
SJ20  JUMPER-PAD-3-2OF3_NC_BY_PASTE  [PAD-JUMPER-3-2OF3_NC_BY_PASTE_YES_SILK_FULL_BOX]  135.89,107.95 270 top
U1  FT232RLSSOP  [SSOP28DB]  27.94,17.02 180 top
U2  MIC5219 3.3V  [SOT23-5]  17.78,20.83 270 top
U3  TS3USB221A  [QFN-10-RSE]  36.2,14.73 0 top
U4  TS3USB221A  [QFN-10-RSE]  75.56,14.73 0 top
U5  FT232RLSSOP  [SSOP28DB]  67.31,17.02 180 top
U6  MIC5219 3.3V  [SOT23-5]  57.15,20.83 270 top
U7  TS3USB221A  [QFN-10-RSE]  114.94,14.73 0 top
U8  FT232RLSSOP  [SSOP28DB]  106.68,17.02 180 top
U9  MIC5219 3.3V  [SOT23-5]  96.52,20.83 270 top
U10  TS3USB221A  [QFN-10-RSE]  154.31,14.73 0 top
U11  FT232RLSSOP  [SSOP28DB]  146.05,17.02 180 top
U12  MIC5219 3.3V  [SOT23-5]  135.89,20.83 270 top
U13  TS3USB221A  [QFN-10-RSE]  36.2,35.56 0 top
U14  FT232RLSSOP  [SSOP28DB]  27.94,37.85 180 top
U15  MIC5219 3.3V  [SOT23-5]  17.78,41.66 270 top
U16  TS3USB221A  [QFN-10-RSE]  75.56,35.56 0 top
U17  FT232RLSSOP  [SSOP28DB]  67.31,37.85 180 top
U18  MIC5219 3.3V  [SOT23-5]  57.15,41.66 270 top
U19  TS3USB221A  [QFN-10-RSE]  114.94,35.56 0 top
U20  FT232RLSSOP  [SSOP28DB]  106.68,37.85 180 top
U21  MIC5219 3.3V  [SOT23-5]  96.52,41.66 270 top
U22  TS3USB221A  [QFN-10-RSE]  154.31,35.56 0 top
U23  FT232RLSSOP  [SSOP28DB]  146.05,37.85 180 top
U24  MIC5219 3.3V  [SOT23-5]  135.89,41.66 270 top
U25  TS3USB221A  [QFN-10-RSE]  36.2,56.39 0 top
U26  FT232RLSSOP  [SSOP28DB]  27.94,58.67 180 top
U27  MIC5219 3.3V  [SOT23-5]  17.78,62.48 270 top
U28  TS3USB221A  [QFN-10-RSE]  75.56,56.39 0 top
U29  FT232RLSSOP  [SSOP28DB]  67.31,58.67 180 top
U30  MIC5219 3.3V  [SOT23-5]  57.15,62.48 270 top
U31  TS3USB221A  [QFN-10-RSE]  114.94,56.39 0 top
U32  FT232RLSSOP  [SSOP28DB]  106.68,58.67 180 top
U33  MIC5219 3.3V  [SOT23-5]  96.52,62.48 270 top
U34  TS3USB221A  [QFN-10-RSE]  154.31,56.39 0 top
U35  FT232RLSSOP  [SSOP28DB]  146.05,58.67 180 top
U36  MIC5219 3.3V  [SOT23-5]  135.89,62.48 270 top
U37  TS3USB221A  [QFN-10-RSE]  36.2,77.22 0 top
U38  FT232RLSSOP  [SSOP28DB]  27.94,79.5 180 top
U39  MIC5219 3.3V  [SOT23-5]  17.78,83.31 270 top
U40  TS3USB221A  [QFN-10-RSE]  75.56,77.22 0 top
U41  FT232RLSSOP  [SSOP28DB]  67.31,79.5 180 top
U42  MIC5219 3.3V  [SOT23-5]  57.15,83.31 270 top
U43  TS3USB221A  [QFN-10-RSE]  114.94,77.22 0 top
U44  FT232RLSSOP  [SSOP28DB]  106.68,79.5 180 top
U45  MIC5219 3.3V  [SOT23-5]  96.52,83.31 270 top
U46  TS3USB221A  [QFN-10-RSE]  154.31,77.22 0 top
U47  FT232RLSSOP  [SSOP28DB]  146.05,79.5 180 top
U48  MIC5219 3.3V  [SOT23-5]  135.89,83.31 270 top
U49  TS3USB221A  [QFN-10-RSE]  36.2,98.04 0 top
U50  FT232RLSSOP  [SSOP28DB]  27.94,100.33 180 top
U51  MIC5219 3.3V  [SOT23-5]  17.78,104.14 270 top
U52  TS3USB221A  [QFN-10-RSE]  75.56,98.04 0 top
U53  FT232RLSSOP  [SSOP28DB]  67.31,100.33 180 top
U54  MIC5219 3.3V  [SOT23-5]  57.15,104.14 270 top
U55  TS3USB221A  [QFN-10-RSE]  114.94,98.04 0 top
U56  FT232RLSSOP  [SSOP28DB]  106.68,100.33 180 top
U57  MIC5219 3.3V  [SOT23-5]  96.52,104.14 270 top
U58  TS3USB221A  [QFN-10-RSE]  154.31,98.04 0 top
U59  FT232RLSSOP  [SSOP28DB]  146.05,100.33 180 top
U60  MIC5219 3.3V  [SOT23-5]  135.89,104.14 270 top
U$1  SMART_BASIC_LOGO  [SMART_BASIC_LOGO]  42.42,10.29 0 bottom
U$2  SMART_BASIC_LOGO  [SMART_BASIC_LOGO]  81.79,10.29 0 bottom
U$3  SMART_BASIC_LOGO  [SMART_BASIC_LOGO]  121.16,10.29 0 bottom
U$4  SMART_BASIC_LOGO  [SMART_BASIC_LOGO]  160.53,10.29 0 bottom
U$5  SMART_BASIC_LOGO  [SMART_BASIC_LOGO]  42.42,31.11 0 bottom
U$6  SMART_BASIC_LOGO  [SMART_BASIC_LOGO]  81.79,31.11 0 bottom
U$7  SMART_BASIC_LOGO  [SMART_BASIC_LOGO]  121.16,31.11 0 bottom
U$8  SMART_BASIC_LOGO  [SMART_BASIC_LOGO]  160.53,31.11 0 bottom
U$9  SMART_BASIC_LOGO  [SMART_BASIC_LOGO]  42.42,51.94 0 bottom
U$10  SMART_BASIC_LOGO  [SMART_BASIC_LOGO]  81.79,51.94 0 bottom
U$11  SMART_BASIC_LOGO  [SMART_BASIC_LOGO]  121.16,51.94 0 bottom
U$12  SMART_BASIC_LOGO  [SMART_BASIC_LOGO]  160.53,51.94 0 bottom
U$13  SMART_BASIC_LOGO  [SMART_BASIC_LOGO]  42.42,72.77 0 bottom
U$14  SMART_BASIC_LOGO  [SMART_BASIC_LOGO]  81.79,72.77 0 bottom
U$15  SMART_BASIC_LOGO  [SMART_BASIC_LOGO]  121.16,72.77 0 bottom
U$16  SMART_BASIC_LOGO  [SMART_BASIC_LOGO]  160.53,72.77 0 bottom
U$17  SMART_BASIC_LOGO  [SMART_BASIC_LOGO]  42.42,93.6 0 bottom
U$18  SMART_BASIC_LOGO  [SMART_BASIC_LOGO]  81.79,93.6 0 bottom
U$19  SMART_BASIC_LOGO  [SMART_BASIC_LOGO]  121.16,93.6 0 bottom
U$20  SMART_BASIC_LOGO  [SMART_BASIC_LOGO]  160.53,93.6 0 bottom

## Library data of the parts
C1 C3 C8 C11 C14 C17 C20 C23 C26 C29 C32 C35 C38 C41 C44 C47 C50 C53 C56 C59 C62 C65 C68 C71 C74 C77 C80 C83 C86 C89 C92 C95 C98 C101 C104 C107 C110 C113 C116 C119 = SparkFun-Capacitors; PROD_ID: CAP-00811
C2 C4-C7 C9 C10 C12 C13 C15 C16 C18 C19 C21 C22 C24 C25 C27 C28 C30 C31 C33 C34 C36 C37 C39 C40 C42 C43 C45 C46 C48 C49 C51 C52 C54 C55 C57 C58 C60 C61 C63 C64 C66 C67 C69 C70 C72 C73 C75 C76 C78 C79 C81 C82 C84 C85 C87 C88 C90 C91 C93 C94 C96 C97 C99 C100 C102 C103 C105 C106 C108 C109 C111 C112 C114 C115 C117 C118 C120 = SparkFun-Capacitors; PROD_ID: CAP-00810
CLIENT CLIENT1-CLIENT19 HOST HOST1-HOST19 JP2 JP3 JP6 JP8 JP10 JP12 JP14 JP16 JP18 JP20 JP22 JP24 JP26 JP28 JP30 JP32 JP34 JP36 JP38 JP40 = SparkFun-Connectors
D1 D3 D4 D6 D7 D9 D10 D12 D13 D15 D16 D18 D19 D21 D22 D24 D25 D27 D28 D30 D31 D33 D34 D36 D37 D39 D40 D42 D43 D45 D46 D48 D49 D51 D52 D54 D55 D57 D58 D60 = SparkFun-LED; PROD_ID: DIO-00821
D2 D5 D8 D11 D14 D17 D20 D23 D26 D29 D32 D35 D38 D41 D44 D47 D50 D53 D56 D59 = SparkFun-LED; PROD_ID: DIO-00819
E$1 = SparkFun-Retired
E$5 E$7 FID1-FID40 LOGO1-LOGO60 U$1-U$20 = SparkFun-Aesthetics
JP1 JP4 JP5 JP7 JP9 JP11 JP13 JP15 JP17 JP19 JP21 JP23 JP25 JP27 JP29 JP31 JP33 JP35 JP37 JP39 = SparkFun-Connectors; PROD_ID: CONN-11752
R1-R3 R5-R7 R9-R12 R14-R17 R19-R22 R24-R27 R29-R32 R34-R37 R39-R42 R44-R47 R49-R52 R54-R57 R59-R62 R64-R67 R69-R72 R74-R77 R79-R82 R84-R87 R89-R92 R94-R97 R99 R100 = SparkFun-Resistors; PROD_ID: RES-07856
R4 R8 R13 R18 R23 R28 R33 R38 R43 R48 R53 R58 R63 R68 R73 R78 R83 R88 R93 R98 = SparkFun-Resistors; PROD_ID: RES-00824
SJ1-SJ20 = SparkFun-Passives
U1 U5 U8 U11 U14 U17 U20 U23 U26 U29 U32 U35 U38 U41 U44 U47 U50 U53 U56 U59 = SparkFun-DigitalIC; PROD_ID: IC-00870
U2 U6 U9 U12 U15 U18 U21 U24 U27 U30 U33 U36 U39 U42 U45 U48 U51 U54 U57 U60 = SparkFun-PowerIC; PROD_ID: VREG-09872
U3 U4 U7 U10 U13 U16 U19 U22 U25 U28 U31 U34 U37 U40 U43 U46 U49 U52 U55 U58 = SparkFun-AnalogIC; PROD_ID: IC-12115

## Nets
3.3V: C3.A C5.1 C6.1 R1.2 R2.2 SJ1.1 U2.5 U3.10
3.3V1: C8.A C10.1 C12.1 R6.2 R7.2 SJ2.1 U4.10 U6.5
3.3V2: C14.A C16.1 C18.1 R11.2 R12.2 SJ3.1 U7.10 U9.5
3.3V3: C20.A C22.1 C24.1 R16.2 R17.2 SJ4.1 U10.10 U12.5
3.3V4: C26.A C28.1 C30.1 R21.2 R22.2 SJ5.1 U13.10 U15.5
3.3V5: C32.A C34.1 C36.1 R26.2 R27.2 SJ6.1 U16.10 U18.5
3.3V6: C38.A C40.1 C42.1 R31.2 R32.2 SJ7.1 U19.10 U21.5
3.3V7: C44.A C46.1 C48.1 R36.2 R37.2 SJ8.1 U22.10 U24.5
3.3V8: C50.A C52.1 C54.1 R41.2 R42.2 SJ9.1 U25.10 U27.5
3.3V9: C56.A C58.1 C60.1 R46.2 R47.2 SJ10.1 U28.10 U30.5
3.3V10: C62.A C64.1 C66.1 R51.2 R52.2 SJ11.1 U31.10 U33.5
3.3V11: C68.A C70.1 C72.1 R56.2 R57.2 SJ12.1 U34.10 U36.5
3.3V12: C74.A C76.1 C78.1 R61.2 R62.2 SJ13.1 U37.10 U39.5
3.3V13: C80.A C82.1 C84.1 R66.2 R67.2 SJ14.1 U40.10 U42.5
3.3V14: C86.A C88.1 C90.1 R71.2 R72.2 SJ15.1 U43.10 U45.5
3.3V15: C92.A C94.1 C96.1 R76.2 R77.2 SJ16.1 U46.10 U48.5
3.3V16: C98.A C100.1 C102.1 R81.2 R82.2 SJ17.1 U49.10 U51.5
3.3V17: C104.A C106.1 C108.1 R86.2 R87.2 SJ18.1 U52.10 U54.5
3.3V18: C110.A C112.1 C114.1 R91.2 R92.2 SJ19.1 U55.10 U57.5
3.3V19: C116.A C118.1 C120.1 R96.2 R97.2 SJ20.1 U58.10 U60.5
5V: C1.A C2.1 JP4.VBUS1 SJ1.3 U1.20 U2.1 U2.3
5V1: C7.1 C11.A JP1.VBUS1 SJ2.3 U5.20 U6.1 U6.3
5V2: C13.1 C17.A JP5.VBUS1 SJ3.3 U8.20 U9.1 U9.3
5V3: C19.1 C23.A JP7.VBUS1 SJ4.3 U11.20 U12.1 U12.3
5V4: C25.1 C29.A JP9.VBUS1 SJ5.3 U14.20 U15.1 U15.3
5V5: C31.1 C35.A JP11.VBUS1 SJ6.3 U17.20 U18.1 U18.3
5V6: C37.1 C41.A JP13.VBUS1 SJ7.3 U20.20 U21.1 U21.3
5V7: C43.1 C47.A JP15.VBUS1 SJ8.3 U23.20 U24.1 U24.3
5V8: C49.1 C53.A JP17.VBUS1 SJ9.3 U26.20 U27.1 U27.3
5V9: C55.1 C59.A JP19.VBUS1 SJ10.3 U29.20 U30.1 U30.3
5V10: C61.1 C65.A JP21.VBUS1 SJ11.3 U32.20 U33.1 U33.3
5V11: C67.1 C71.A JP23.VBUS1 SJ12.3 U35.20 U36.1 U36.3
5V12: C73.1 C77.A JP25.VBUS1 SJ13.3 U38.20 U39.1 U39.3
5V13: C79.1 C83.A JP27.VBUS1 SJ14.3 U41.20 U42.1 U42.3
5V14: C85.1 C89.A JP29.VBUS1 SJ15.3 U44.20 U45.1 U45.3
5V15: C91.1 C95.A JP31.VBUS1 SJ16.3 U47.20 U48.1 U48.3
5V16: C97.1 C101.A JP33.VBUS1 SJ17.3 U50.20 U51.1 U51.3
5V17: C103.1 C107.A JP35.VBUS1 SJ18.3 U53.20 U54.1 U54.3
5V18: C109.1 C113.A JP37.VBUS1 SJ19.3 U56.20 U57.1 U57.3
5V19: C115.1 C119.A JP39.VBUS1 SJ20.3 U59.20 U60.1 U60.3
!OE: JP2.1 R4.1 U3.6
!OE1: JP3.1 R8.1 U4.6
!OE2: JP6.1 R13.1 U7.6
!OE3: JP8.1 R18.1 U10.6
!OE4: JP10.1 R23.1 U13.6
!OE5: JP12.1 R28.1 U16.6
!OE6: JP14.1 R33.1 U19.6
!OE7: JP16.1 R38.1 U22.6
!OE8: JP18.1 R43.1 U25.6
!OE9: JP20.1 R48.1 U28.6
!OE10: JP22.1 R53.1 U31.6
!OE11: JP24.1 R58.1 U34.6
!OE12: JP26.1 R63.1 U37.6
!OE13: JP28.1 R68.1 U40.6
!OE14: JP30.1 R73.1 U43.6
!OE15: JP32.1 R78.1 U46.6
!OE16: JP34.1 R83.1 U49.6
!OE17: JP36.1 R88.1 U52.6
!OE18: JP38.1 R93.1 U55.6
!OE19: JP40.1 R98.1 U58.6
CTS: CLIENT.CTS U1.11
CTS1: CLIENT1.CTS U5.11
CTS2: CLIENT2.CTS U8.11
CTS3: CLIENT3.CTS U11.11
CTS4: CLIENT4.CTS U14.11
CTS5: CLIENT5.CTS U17.11
CTS6: CLIENT6.CTS U20.11
CTS7: CLIENT7.CTS U23.11
CTS8: CLIENT8.CTS U26.11
CTS9: CLIENT9.CTS U29.11
CTS10: CLIENT10.CTS U32.11
CTS11: CLIENT11.CTS U35.11
CTS12: CLIENT12.CTS U38.11
CTS13: CLIENT13.CTS U41.11
CTS14: CLIENT14.CTS U44.11
CTS15: CLIENT15.CTS U47.11
CTS16: CLIENT16.CTS U50.11
CTS17: CLIENT17.CTS U53.11
CTS18: CLIENT18.CTS U56.11
CTS19: CLIENT19.CTS U59.11
DTR: CLIENT.DTR U1.2
DTR1: CLIENT1.DTR U5.2
DTR2: CLIENT2.DTR U8.2
DTR3: CLIENT3.DTR U11.2
DTR4: CLIENT4.DTR U14.2
DTR5: CLIENT5.DTR U17.2
DTR6: CLIENT6.DTR U20.2
DTR7: CLIENT7.DTR U23.2
DTR8: CLIENT8.DTR U26.2
DTR9: CLIENT9.DTR U29.2
DTR10: CLIENT10.DTR U32.2
DTR11: CLIENT11.DTR U35.2
DTR12: CLIENT12.DTR U38.2
DTR13: CLIENT13.DTR U41.2
DTR14: CLIENT14.DTR U44.2
DTR15: CLIENT15.DTR U47.2
DTR16: CLIENT16.DTR U50.2
DTR17: CLIENT17.DTR U53.2
DTR18: CLIENT18.DTR U56.2
DTR19: CLIENT19.DTR U59.2
GND: C1.C C2.2 C3.C C4.2 C5.2 C6.2 CLIENT.GND HOST.P$6 JP4.GND1 R3.1 R4.2 R5.1 U1.7 U1.18 U1.21 U1.25 U1.26 U2.2 U3.5
GND1: C7.2 C8.C C9.2 C10.2 C11.C C12.2 CLIENT1.GND HOST1.P$6 JP1.GND1 R8.2 R9.1 R10.1 U4.5 U5.7 U5.18 U5.21 U5.25 U5.26 U6.2
GND2: C13.2 C14.C C15.2 C16.2 C17.C C18.2 CLIENT2.GND HOST2.P$6 JP5.GND1 R13.2 R14.1 R15.1 U7.5 U8.7 U8.18 U8.21 U8.25 U8.26 U9.2
GND3: C19.2 C20.C C21.2 C22.2 C23.C C24.2 CLIENT3.GND HOST3.P$6 JP7.GND1 R18.2 R19.1 R20.1 U10.5 U11.7 U11.18 U11.21 U11.25 U11.26 U12.2
GND4: C25.2 C26.C C27.2 C28.2 C29.C C30.2 CLIENT4.GND HOST4.P$6 JP9.GND1 R23.2 R24.1 R25.1 U13.5 U14.7 U14.18 U14.21 U14.25 U14.26 U15.2
GND5: C31.2 C32.C C33.2 C34.2 C35.C C36.2 CLIENT5.GND HOST5.P$6 JP11.GND1 R28.2 R29.1 R30.1 U16.5 U17.7 U17.18 U17.21 U17.25 U17.26 U18.2
GND6: C37.2 C38.C C39.2 C40.2 C41.C C42.2 CLIENT6.GND HOST6.P$6 JP13.GND1 R33.2 R34.1 R35.1 U19.5 U20.7 U20.18 U20.21 U20.25 U20.26 U21.2
GND7: C43.2 C44.C C45.2 C46.2 C47.C C48.2 CLIENT7.GND HOST7.P$6 JP15.GND1 R38.2 R39.1 R40.1 U22.5 U23.7 U23.18 U23.21 U23.25 U23.26 U24.2
GND8: C49.2 C50.C C51.2 C52.2 C53.C C54.2 CLIENT8.GND HOST8.P$6 JP17.GND1 R43.2 R44.1 R45.1 U25.5 U26.7 U26.18 U26.21 U26.25 U26.26 U27.2
GND9: C55.2 C56.C C57.2 C58.2 C59.C C60.2 CLIENT9.GND HOST9.P$6 JP19.GND1 R48.2 R49.1 R50.1 U28.5 U29.7 U29.18 U29.21 U29.25 U29.26 U30.2
GND10: C61.2 C62.C C63.2 C64.2 C65.C C66.2 CLIENT10.GND HOST10.P$6 JP21.GND1 R53.2 R54.1 R55.1 U31.5 U32.7 U32.18 U32.21 U32.25 U32.26 U33.2
GND11: C67.2 C68.C C69.2 C70.2 C71.C C72.2 CLIENT11.GND HOST11.P$6 JP23.GND1 R58.2 R59.1 R60.1 U34.5 U35.7 U35.18 U35.21 U35.25 U35.26 U36.2
GND12: C73.2 C74.C C75.2 C76.2 C77.C C78.2 CLIENT12.GND HOST12.P$6 JP25.GND1 R63.2 R64.1 R65.1 U37.5 U38.7 U38.18 U38.21 U38.25 U38.26 U39.2
GND13: C79.2 C80.C C81.2 C82.2 C83.C C84.2 CLIENT13.GND HOST13.P$6 JP27.GND1 R68.2 R69.1 R70.1 U40.5 U41.7 U41.18 U41.21 U41.25 U41.26 U42.2
GND14: C85.2 C86.C C87.2 C88.2 C89.C C90.2 CLIENT14.GND HOST14.P$6 JP29.GND1 R73.2 R74.1 R75.1 U43.5 U44.7 U44.18 U44.21 U44.25 U44.26 U45.2
GND15: C91.2 C92.C C93.2 C94.2 C95.C C96.2 CLIENT15.GND HOST15.P$6 JP31.GND1 R78.2 R79.1 R80.1 U46.5 U47.7 U47.18 U47.21 U47.25 U47.26 U48.2
GND16: C97.2 C98.C C99.2 C100.2 C101.C C102.2 CLIENT16.GND HOST16.P$6 JP33.GND1 R83.2 R84.1 R85.1 U49.5 U50.7 U50.18 U50.21 U50.25 U50.26 U51.2
GND17: C103.2 C104.C C105.2 C106.2 C107.C C108.2 CLIENT17.GND HOST17.P$6 JP35.GND1 R88.2 R89.1 R90.1 U52.5 U53.7 U53.18 U53.21 U53.25 U53.26 U54.2
GND18: C109.2 C110.C C111.2 C112.2 C113.C C114.2 CLIENT18.GND HOST18.P$6 JP37.GND1 R93.2 R94.1 R95.1 U55.5 U56.7 U56.18 U56.21 U56.25 U56.26 U57.2
GND19: C115.2 C116.C C117.2 C118.2 C119.C C120.2 CLIENT19.GND HOST19.P$6 JP39.GND1 R98.2 R99.1 R100.1 U58.5 U59.7 U59.18 U59.21 U59.25 U59.26 U60.2
N$1: JP4.D-1 U1.16
N$2: C4.1 U1.17
N$3: JP4.D+1 U1.15
N$4: D4.C R5.2
N$5: D2.A R1.1
N$6: D1.A R2.1
N$7: JP1.D-1 U5.16
N$8: JP1.D+1 U5.15
N$9: D5.A R6.1
N$10: D3.A R7.1
N$11: U1.5 U3.1
N$12: U1.1 U3.2
N$13: CLIENT.RXI U3.8
N$14: CLIENT.TXO U3.7
N$15: CLIENT1.RXI U4.8
N$16: HOST.P$2 U3.3
N$17: HOST.P$3 U3.4
N$18: CLIENT1.TXO U4.7
N$19: U4.1 U5.5
N$20: U4.2 U5.1
N$21: HOST1.P$2 U4.3
N$22: HOST1.P$3 U4.4
N$23: C9.1 U5.17
N$24: D6.C R10.2
N$25: JP5.D-1 U8.16
N$26: JP5.D+1 U8.15
N$27: D8.A R11.1
N$28: D7.A R12.1
N$29: CLIENT2.RXI U7.8
N$30: CLIENT2.TXO U7.7
N$31: U7.1 U8.5
N$32: U7.2 U8.1
N$33: HOST2.P$2 U7.3
N$34: HOST2.P$3 U7.4
N$35: C15.1 U8.17
N$36: D9.C R15.2
N$37: JP7.D-1 U11.16
N$38: JP7.D+1 U11.15
N$39: D11.A R16.1
N$40: D10.A R17.1
N$41: CLIENT3.RXI U10.8
N$42: CLIENT3.TXO U10.7
N$43: U10.1 U11.5
N$44: U10.2 U11.1
N$45: HOST3.P$2 U10.3
N$46: HOST3.P$3 U10.4
N$47: C21.1 U11.17
N$48: D12.C R20.2
N$49: JP9.D-1 U14.16
N$50: JP9.D+1 U14.15
N$51: D14.A R21.1
N$52: D13.A R22.1
N$53: CLIENT4.RXI U13.8
N$54: CLIENT4.TXO U13.7
N$55: U13.1 U14.5
N$56: U13.2 U14.1
N$57: HOST4.P$2 U13.3
N$58: HOST4.P$3 U13.4
N$59: C27.1 U14.17
N$60: D15.C R25.2
N$61: JP11.D-1 U17.16
N$62: JP11.D+1 U17.15
N$63: D17.A R26.1
N$64: D16.A R27.1
N$65: CLIENT5.RXI U16.8
N$66: CLIENT5.TXO U16.7
N$67: U16.1 U17.5
N$68: U16.2 U17.1
N$69: HOST5.P$2 U16.3
N$70: HOST5.P$3 U16.4
N$71: C33.1 U17.17
N$72: D18.C R30.2
N$73: JP13.D-1 U20.16
N$74: JP13.D+1 U20.15
N$75: D20.A R31.1
N$76: D19.A R32.1
N$77: CLIENT6.RXI U19.8
N$78: CLIENT6.TXO U19.7
N$79: U19.1 U20.5
N$80: U19.2 U20.1
N$81: HOST6.P$2 U19.3
N$82: HOST6.P$3 U19.4
N$83: C39.1 U20.17
N$84: D21.C R35.2
N$85: JP15.D-1 U23.16
N$86: JP15.D+1 U23.15
N$87: D23.A R36.1
N$88: D22.A R37.1
N$89: CLIENT7.RXI U22.8
N$90: CLIENT7.TXO U22.7
N$91: U22.1 U23.5
N$92: U22.2 U23.1
N$93: HOST7.P$2 U22.3
N$94: HOST7.P$3 U22.4
N$95: C45.1 U23.17
N$96: D24.C R40.2
N$97: JP17.D-1 U26.16
N$98: JP17.D+1 U26.15
N$99: D26.A R41.1
N$100: D25.A R42.1
N$101: CLIENT8.RXI U25.8
N$102: CLIENT8.TXO U25.7
N$103: U25.1 U26.5
N$104: U25.2 U26.1
N$105: HOST8.P$2 U25.3
N$106: HOST8.P$3 U25.4
N$107: C51.1 U26.17
N$108: D27.C R45.2
N$109: JP19.D-1 U29.16
N$110: JP19.D+1 U29.15
N$111: D29.A R46.1
N$112: D28.A R47.1
N$113: CLIENT9.RXI U28.8
N$114: CLIENT9.TXO U28.7
N$115: U28.1 U29.5
N$116: U28.2 U29.1
N$117: HOST9.P$2 U28.3
N$118: HOST9.P$3 U28.4
N$119: C57.1 U29.17
N$120: D30.C R50.2
N$121: JP21.D-1 U32.16
N$122: JP21.D+1 U32.15
N$123: D32.A R51.1
N$124: D31.A R52.1
N$125: CLIENT10.RXI U31.8
N$126: CLIENT10.TXO U31.7
N$127: U31.1 U32.5
N$128: U31.2 U32.1
N$129: HOST10.P$2 U31.3
N$130: HOST10.P$3 U31.4
N$131: C63.1 U32.17
N$132: D33.C R55.2
N$133: JP23.D-1 U35.16
N$134: JP23.D+1 U35.15
N$135: D35.A R56.1
N$136: D34.A R57.1
N$137: CLIENT11.RXI U34.8
N$138: CLIENT11.TXO U34.7
N$139: U34.1 U35.5
N$140: U34.2 U35.1
N$141: HOST11.P$2 U34.3
N$142: HOST11.P$3 U34.4
N$143: C69.1 U35.17
N$144: D36.C R60.2
N$145: JP25.D-1 U38.16
N$146: JP25.D+1 U38.15
N$147: D38.A R61.1
N$148: D37.A R62.1
N$149: CLIENT12.RXI U37.8
N$150: CLIENT12.TXO U37.7
N$151: U37.1 U38.5
N$152: U37.2 U38.1
N$153: HOST12.P$2 U37.3
N$154: HOST12.P$3 U37.4
N$155: C75.1 U38.17
N$156: D39.C R65.2
N$157: JP27.D-1 U41.16
N$158: JP27.D+1 U41.15
N$159: D41.A R66.1
N$160: D40.A R67.1
N$161: CLIENT13.RXI U40.8
N$162: CLIENT13.TXO U40.7
N$163: U40.1 U41.5
N$164: U40.2 U41.1
N$165: HOST13.P$2 U40.3
N$166: HOST13.P$3 U40.4
N$167: C81.1 U41.17
N$168: D42.C R70.2
N$169: JP29.D-1 U44.16
N$170: JP29.D+1 U44.15
N$171: D44.A R71.1
N$172: D43.A R72.1
N$173: CLIENT14.RXI U43.8
N$174: CLIENT14.TXO U43.7
N$175: U43.1 U44.5
N$176: U43.2 U44.1
N$177: HOST14.P$2 U43.3
N$178: HOST14.P$3 U43.4
N$179: C87.1 U44.17
N$180: D45.C R75.2
N$181: JP31.D-1 U47.16
N$182: JP31.D+1 U47.15
N$183: D47.A R76.1
N$184: D46.A R77.1
N$185: CLIENT15.RXI U46.8
N$186: CLIENT15.TXO U46.7
N$187: U46.1 U47.5
N$188: U46.2 U47.1
N$189: HOST15.P$2 U46.3
N$190: HOST15.P$3 U46.4
N$191: C93.1 U47.17
N$192: D48.C R80.2
N$193: JP33.D-1 U50.16
N$194: JP33.D+1 U50.15
N$195: D50.A R81.1
N$196: D49.A R82.1
N$197: CLIENT16.RXI U49.8
N$198: CLIENT16.TXO U49.7
N$199: U49.1 U50.5
N$200: U49.2 U50.1
N$201: HOST16.P$2 U49.3
N$202: HOST16.P$3 U49.4
N$203: C99.1 U50.17
N$204: D51.C R85.2
N$205: JP35.D-1 U53.16
N$206: JP35.D+1 U53.15
N$207: D53.A R86.1
N$208: D52.A R87.1
N$209: CLIENT17.RXI U52.8
N$210: CLIENT17.TXO U52.7
N$211: U52.1 U53.5
N$212: U52.2 U53.1
N$213: HOST17.P$2 U52.3
N$214: HOST17.P$3 U52.4
N$215: C105.1 U53.17
N$216: D54.C R90.2
N$217: JP37.D-1 U56.16
N$218: JP37.D+1 U56.15
N$219: D56.A R91.1
N$220: D55.A R92.1
N$221: CLIENT18.RXI U55.8
N$222: CLIENT18.TXO U55.7
N$223: U55.1 U56.5
N$224: U55.2 U56.1
N$225: HOST18.P$2 U55.3
N$226: HOST18.P$3 U55.4
N$227: C111.1 U56.17
N$228: D57.C R95.2
N$229: JP39.D-1 U59.16
N$230: JP39.D+1 U59.15
N$231: D59.A R96.1
N$232: D58.A R97.1
N$233: CLIENT19.RXI U58.8
N$234: CLIENT19.TXO U58.7
N$235: U58.1 U59.5
N$236: U58.2 U59.1
N$237: HOST19.P$2 U58.3
N$238: HOST19.P$3 U58.4
N$239: C117.1 U59.17
N$240: D60.C R100.2
RXLED: D1.C U1.22
RXLED1: D3.C U5.22
RXLED2: D7.C U8.22
RXLED3: D10.C U11.22
RXLED4: D13.C U14.22
RXLED5: D16.C U17.22
RXLED6: D19.C U20.22
RXLED7: D22.C U23.22
RXLED8: D25.C U26.22
RXLED9: D28.C U29.22
RXLED10: D31.C U32.22
RXLED11: D34.C U35.22
RXLED12: D37.C U38.22
RXLED13: D40.C U41.22
RXLED14: D43.C U44.22
RXLED15: D46.C U47.22
RXLED16: D49.C U50.22
RXLED17: D52.C U53.22
RXLED18: D55.C U56.22
RXLED19: D58.C U59.22
SELECT: D4.A JP2.2 R3.2 U3.9
SELECT1: D6.A JP3.2 R9.2 U4.9
SELECT2: D9.A JP6.2 R14.2 U7.9
SELECT3: D12.A JP8.2 R19.2 U10.9
SELECT4: D15.A JP10.2 R24.2 U13.9
SELECT5: D18.A JP12.2 R29.2 U16.9
SELECT6: D21.A JP14.2 R34.2 U19.9
SELECT7: D24.A JP16.2 R39.2 U22.9
SELECT8: D27.A JP18.2 R44.2 U25.9
SELECT9: D30.A JP20.2 R49.2 U28.9
SELECT10: D33.A JP22.2 R54.2 U31.9
SELECT11: D36.A JP24.2 R59.2 U34.9
SELECT12: D39.A JP26.2 R64.2 U37.9
SELECT13: D42.A JP28.2 R69.2 U40.9
SELECT14: D45.A JP30.2 R74.2 U43.9
SELECT15: D48.A JP32.2 R79.2 U46.9
SELECT16: D51.A JP34.2 R84.2 U49.9
SELECT17: D54.A JP36.2 R89.2 U52.9
SELECT18: D57.A JP38.2 R94.2 U55.9
SELECT19: D60.A JP40.2 R99.2 U58.9
SHIELD_POUR: JP4.SHIELD1 JP4.SHIELD2 JP4.SHIELD3
SHIELD_POUR1: JP1.SHIELD1 JP1.SHIELD2 JP1.SHIELD3
SHIELD_POUR2: JP5.SHIELD1 JP5.SHIELD2 JP5.SHIELD3
SHIELD_POUR3: JP7.SHIELD1 JP7.SHIELD2 JP7.SHIELD3
SHIELD_POUR4: JP9.SHIELD1 JP9.SHIELD2 JP9.SHIELD3
SHIELD_POUR5: JP11.SHIELD1 JP11.SHIELD2 JP11.SHIELD3
SHIELD_POUR6: JP13.SHIELD1 JP13.SHIELD2 JP13.SHIELD3
SHIELD_POUR7: JP15.SHIELD1 JP15.SHIELD2 JP15.SHIELD3
SHIELD_POUR8: JP17.SHIELD1 JP17.SHIELD2 JP17.SHIELD3
SHIELD_POUR9: JP19.SHIELD1 JP19.SHIELD2 JP19.SHIELD3
SHIELD_POUR10: JP21.SHIELD1 JP21.SHIELD2 JP21.SHIELD3
SHIELD_POUR11: JP23.SHIELD1 JP23.SHIELD2 JP23.SHIELD3
SHIELD_POUR12: JP25.SHIELD1 JP25.SHIELD2 JP25.SHIELD3
SHIELD_POUR13: JP27.SHIELD1 JP27.SHIELD2 JP27.SHIELD3
SHIELD_POUR14: JP29.SHIELD1 JP29.SHIELD2 JP29.SHIELD3
SHIELD_POUR15: JP31.SHIELD1 JP31.SHIELD2 JP31.SHIELD3
SHIELD_POUR16: JP33.SHIELD1 JP33.SHIELD2 JP33.SHIELD3
SHIELD_POUR17: JP35.SHIELD1 JP35.SHIELD2 JP35.SHIELD3
SHIELD_POUR18: JP37.SHIELD1 JP37.SHIELD2 JP37.SHIELD3
SHIELD_POUR19: JP39.SHIELD1 JP39.SHIELD2 JP39.SHIELD3
TXLED: D2.C U1.23
TXLED1: D5.C U5.23
TXLED2: D8.C U8.23
TXLED3: D11.C U11.23
TXLED4: D14.C U14.23
TXLED5: D17.C U17.23
TXLED6: D20.C U20.23
TXLED7: D23.C U23.23
TXLED8: D26.C U26.23
TXLED9: D29.C U29.23
TXLED10: D32.C U32.23
TXLED11: D35.C U35.23
TXLED12: D38.C U38.23
TXLED13: D41.C U41.23
TXLED14: D44.C U44.23
TXLED15: D47.C U47.23
TXLED16: D50.C U50.23
TXLED17: D53.C U53.23
TXLED18: D56.C U56.23
TXLED19: D59.C U59.23
V_OUT: CLIENT.VCC HOST.P$4 SJ1.2 U1.4
V_OUT1: CLIENT1.VCC HOST1.P$4 SJ2.2 U5.4
V_OUT2: CLIENT2.VCC HOST2.P$4 SJ3.2 U8.4
V_OUT3: CLIENT3.VCC HOST3.P$4 SJ4.2 U11.4
V_OUT4: CLIENT4.VCC HOST4.P$4 SJ5.2 U14.4
V_OUT5: CLIENT5.VCC HOST5.P$4 SJ6.2 U17.4
V_OUT6: CLIENT6.VCC HOST6.P$4 SJ7.2 U20.4
V_OUT7: CLIENT7.VCC HOST7.P$4 SJ8.2 U23.4
V_OUT8: CLIENT8.VCC HOST8.P$4 SJ9.2 U26.4
V_OUT9: CLIENT9.VCC HOST9.P$4 SJ10.2 U29.4
V_OUT10: CLIENT10.VCC HOST10.P$4 SJ11.2 U32.4
V_OUT11: CLIENT11.VCC HOST11.P$4 SJ12.2 U35.4
V_OUT12: CLIENT12.VCC HOST12.P$4 SJ13.2 U38.4
V_OUT13: CLIENT13.VCC HOST13.P$4 SJ14.2 U41.4
V_OUT14: CLIENT14.VCC HOST14.P$4 SJ15.2 U44.4
V_OUT15: CLIENT15.VCC HOST15.P$4 SJ16.2 U47.4
V_OUT16: CLIENT16.VCC HOST16.P$4 SJ17.2 U50.4
V_OUT17: CLIENT17.VCC HOST17.P$4 SJ18.2 U53.4
V_OUT18: CLIENT18.VCC HOST18.P$4 SJ19.2 U56.4
V_OUT19: CLIENT19.VCC HOST19.P$4 SJ20.2 U59.4

## Tracks (layer width: path | path; a pad name or v marks a point on that pad's centre or on a via)
3.3V  (via drill 0.51)
  Top 0.254: 32.17,24.51 R2.2 30.99,23.62 30.39,24.42 29.12,24.42 28.49,23.79 C5.1 23.28,23.79 22.99,23.5 21.84,23.5 21.59,23.24 C3.A 20.32,21.97 20.13,21.78 U2.5 19.08,22.38 19.43,22.73 19.43,25.15 19.13,25.45 SJ1.1 | 32.17,24.51 R1.2 | v35.94,19.3 35.94,23.88 35.31,24.51 32.17,24.51 | U3.10 36.2,16.26 36.07,16.38 35.18,16.38 | v33.91,17.27 33.91,16.89 34.42,16.38 35.18,16.38 | C6.1 35.22,16.42 35.18,16.38
  Bottom 0.254: v33.91,17.27 33.91,18.03 35.18,19.3 v35.94,19.3
3.3V1  (via drill 0.51)
  Top 0.254: 71.54,24.51 R7.2 70.36,23.62 69.76,24.42 68.49,24.42 67.86,23.79 C10.1 62.65,23.79 62.36,23.5 61.21,23.5 60.96,23.24 C8.A 59.69,21.97 59.5,21.78 U6.5 58.45,22.38 58.8,22.73 58.8,25.15 58.5,25.45 SJ2.1 | 71.54,24.51 R6.2 | v75.31,19.3 75.31,23.88 74.68,24.51 71.54,24.51 | U4.10 75.56,16.26 75.44,16.38 74.55,16.38 | v73.28,17.27 73.28,16.89 73.79,16.38 74.55,16.38 | C12.1 74.59,16.42 74.55,16.38
  Bottom 0.254: v73.28,17.27 73.28,18.03 74.55,19.3 v75.31,19.3
3.3V2  (via drill 0.51)
  Top 0.254: 110.91,24.51 R12.2 109.73,23.62 109.13,24.42 107.86,24.42 107.23,23.79 C16.1 102.02,23.79 101.73,23.5 100.58,23.5 100.33,23.24 C14.A 99.06,21.97 98.87,21.78 U9.5 97.82,22.38 98.17,22.73 98.17,25.15 97.87,25.45 SJ3.1 | 110.91,24.51 R11.2 | v114.68,19.3 114.68,23.88 114.05,24.51 110.91,24.51 | U7.10 114.94,16.26 114.81,16.38 113.92,16.38 | v112.65,17.27 112.65,16.89 113.16,16.38 113.92,16.38 | C18.1 113.96,16.42 113.92,16.38
  Bottom 0.254: v112.65,17.27 112.65,18.03 113.92,19.3 v114.68,19.3
3.3V3  (via drill 0.51)